# Altium PCB FlexEMG_v0r0.PcbDoc (part 1 of 2)
Units mil, origin at the board's own origin, x right, y up, seen from the top; angles counter-clockwise.
Board outline 1300 x 1550 mil, 8 copper layers (Top Layer, PWR 1, Signal 1, GND, Signal 2, PWR 2, Signal 3, Bottom Layer), stack 66.302 mil thick; 200 components, 251 nets, 1187 pads, 472 vias.
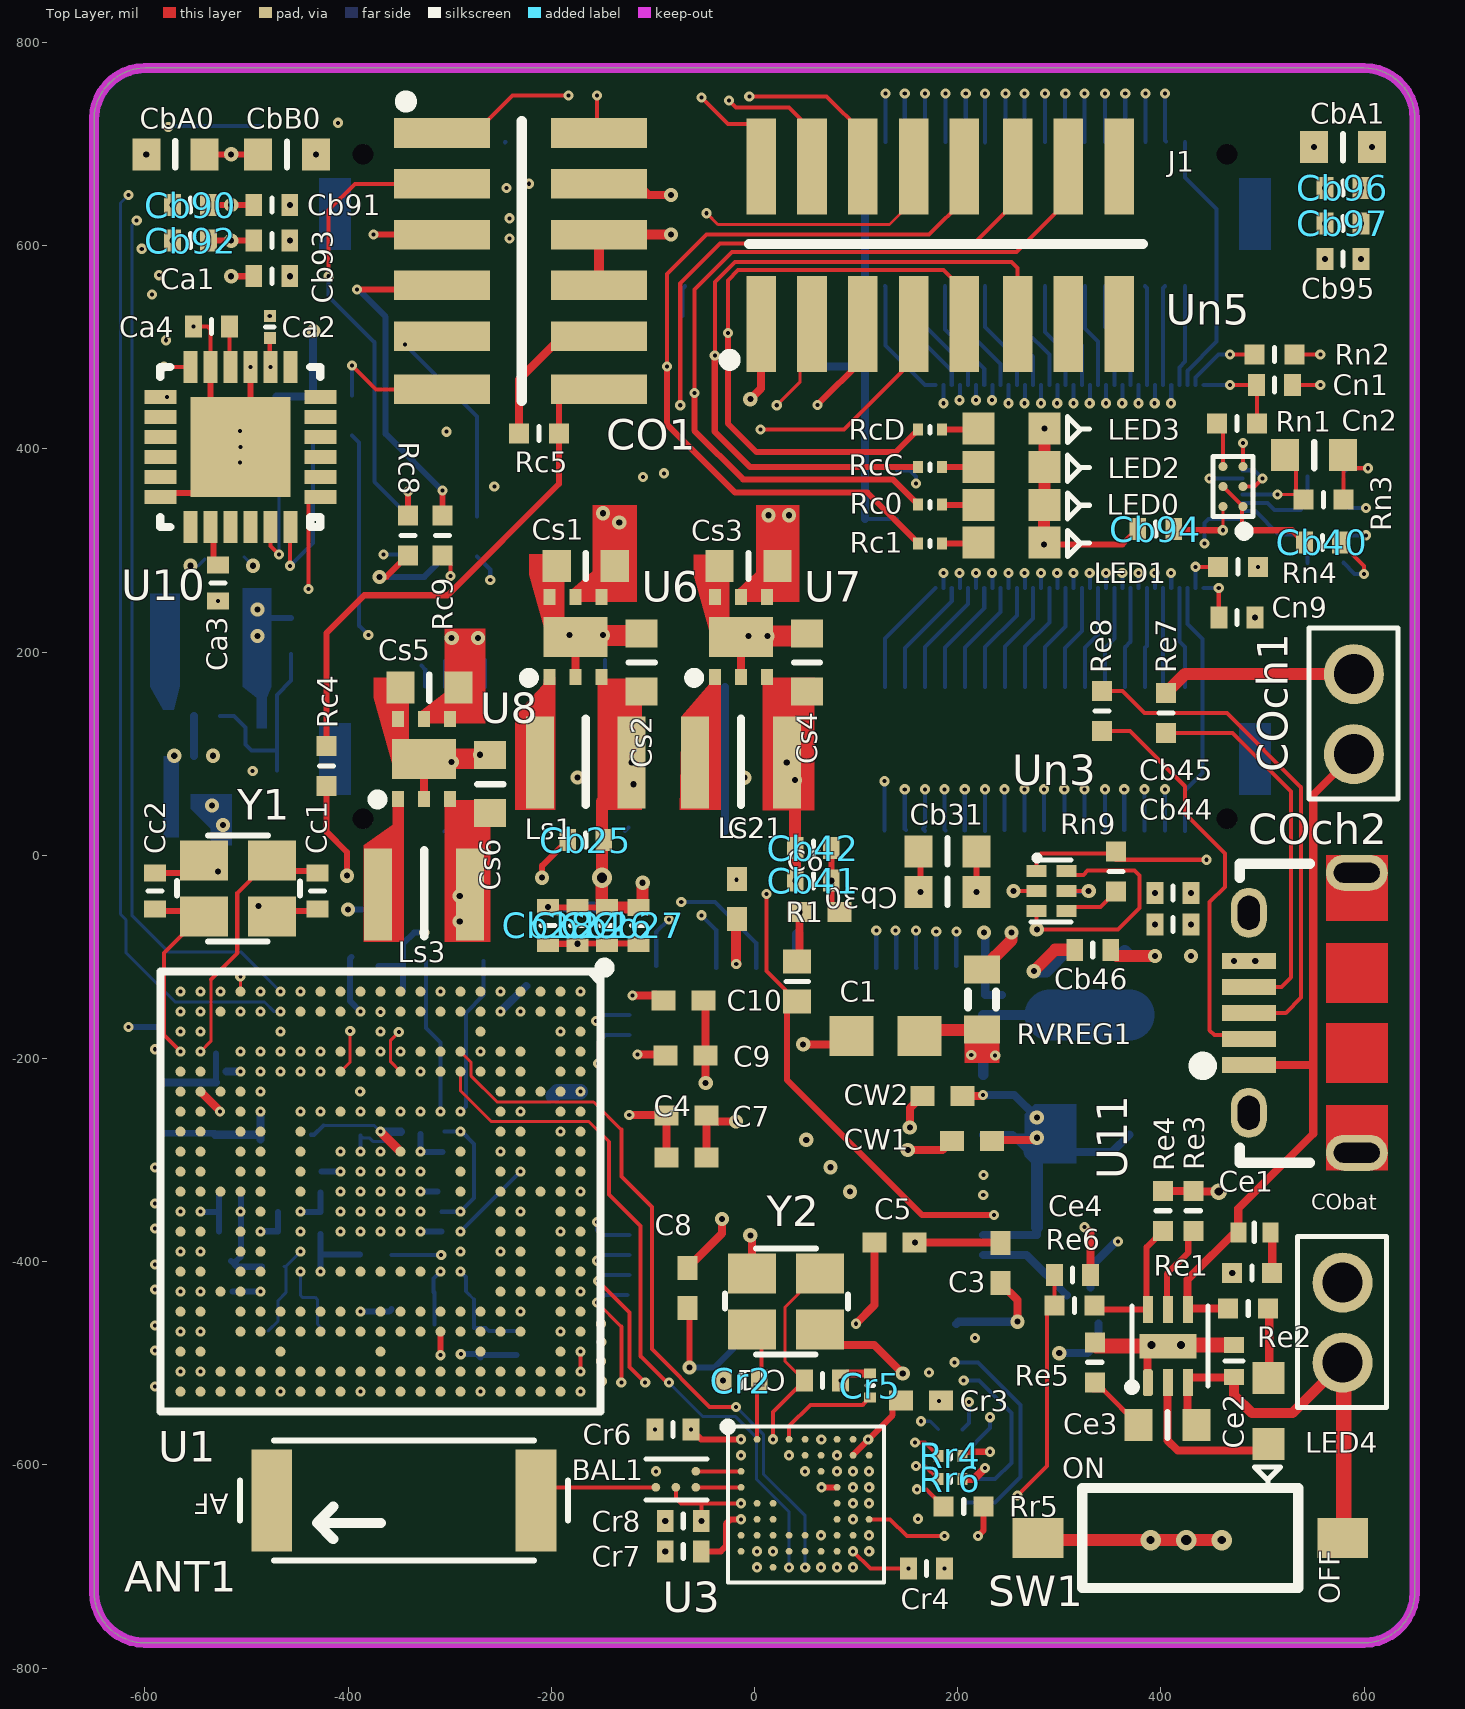
[diagram p0: Top Layer view]
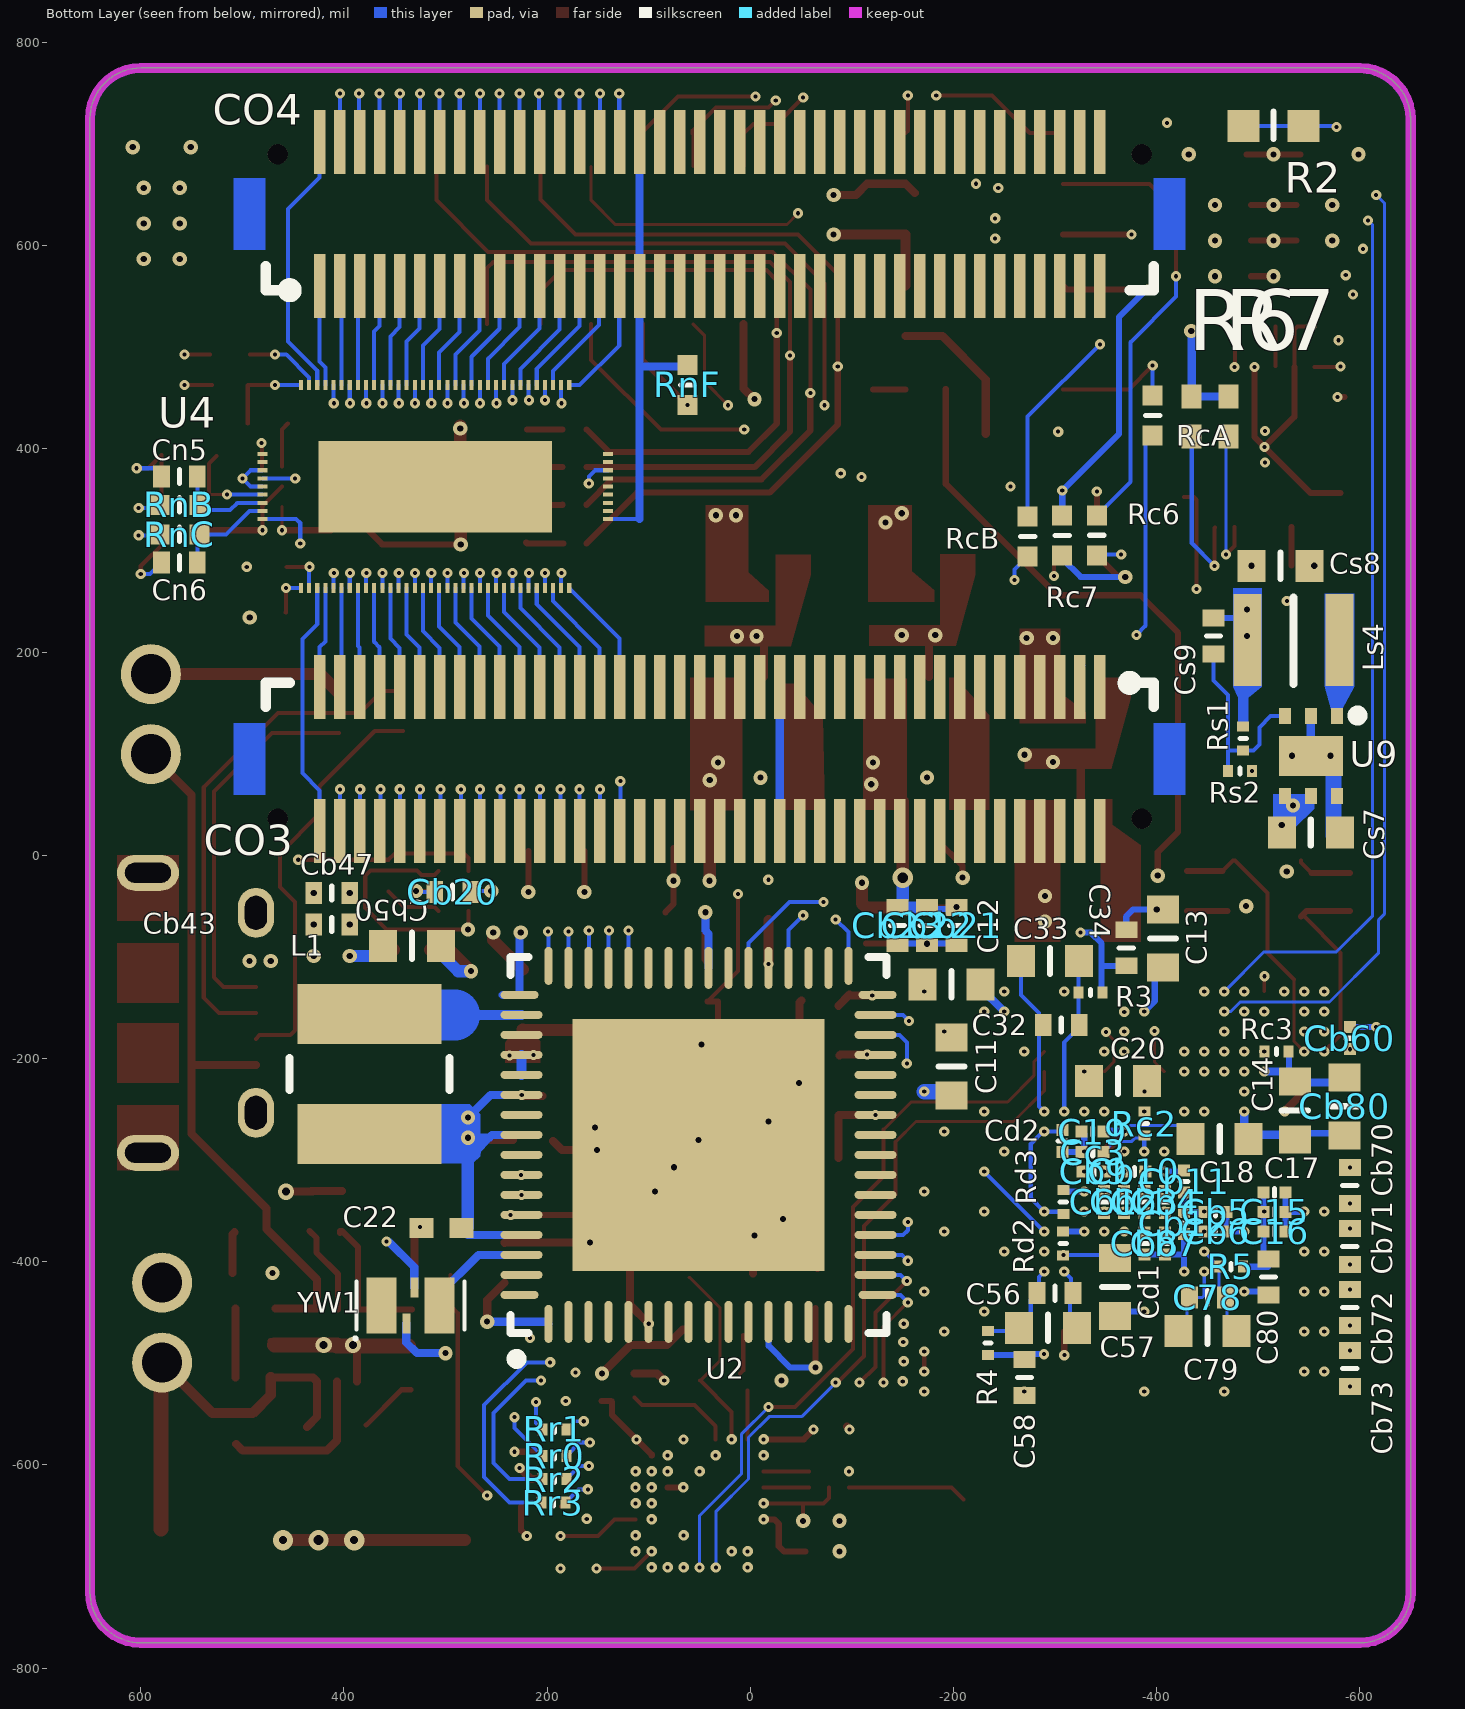
[diagram p1: Bottom Layer view, seen from below]
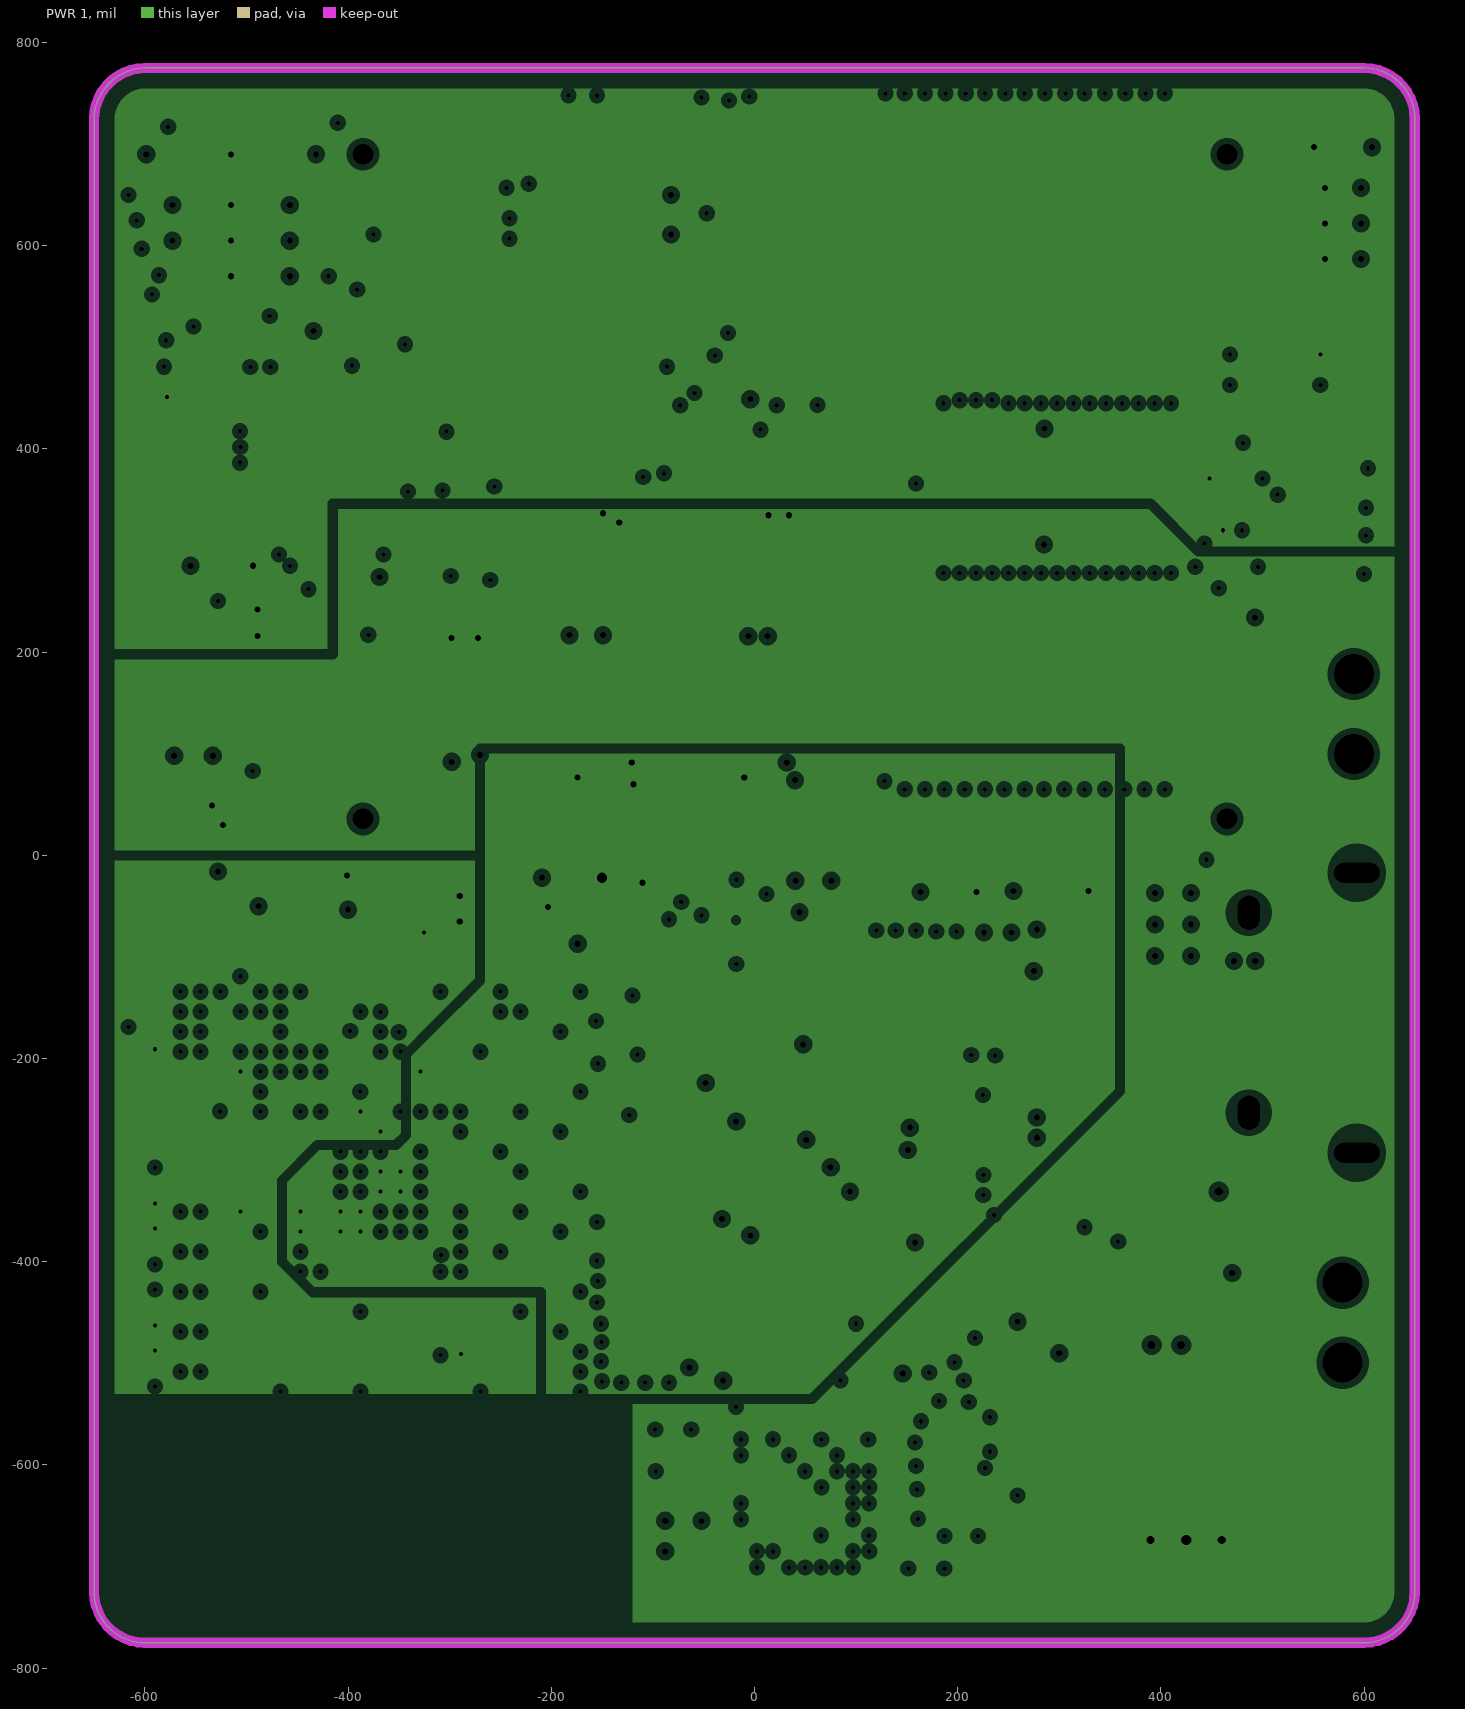
[diagram p2: PWR 1, clearances drawn from the general rule]
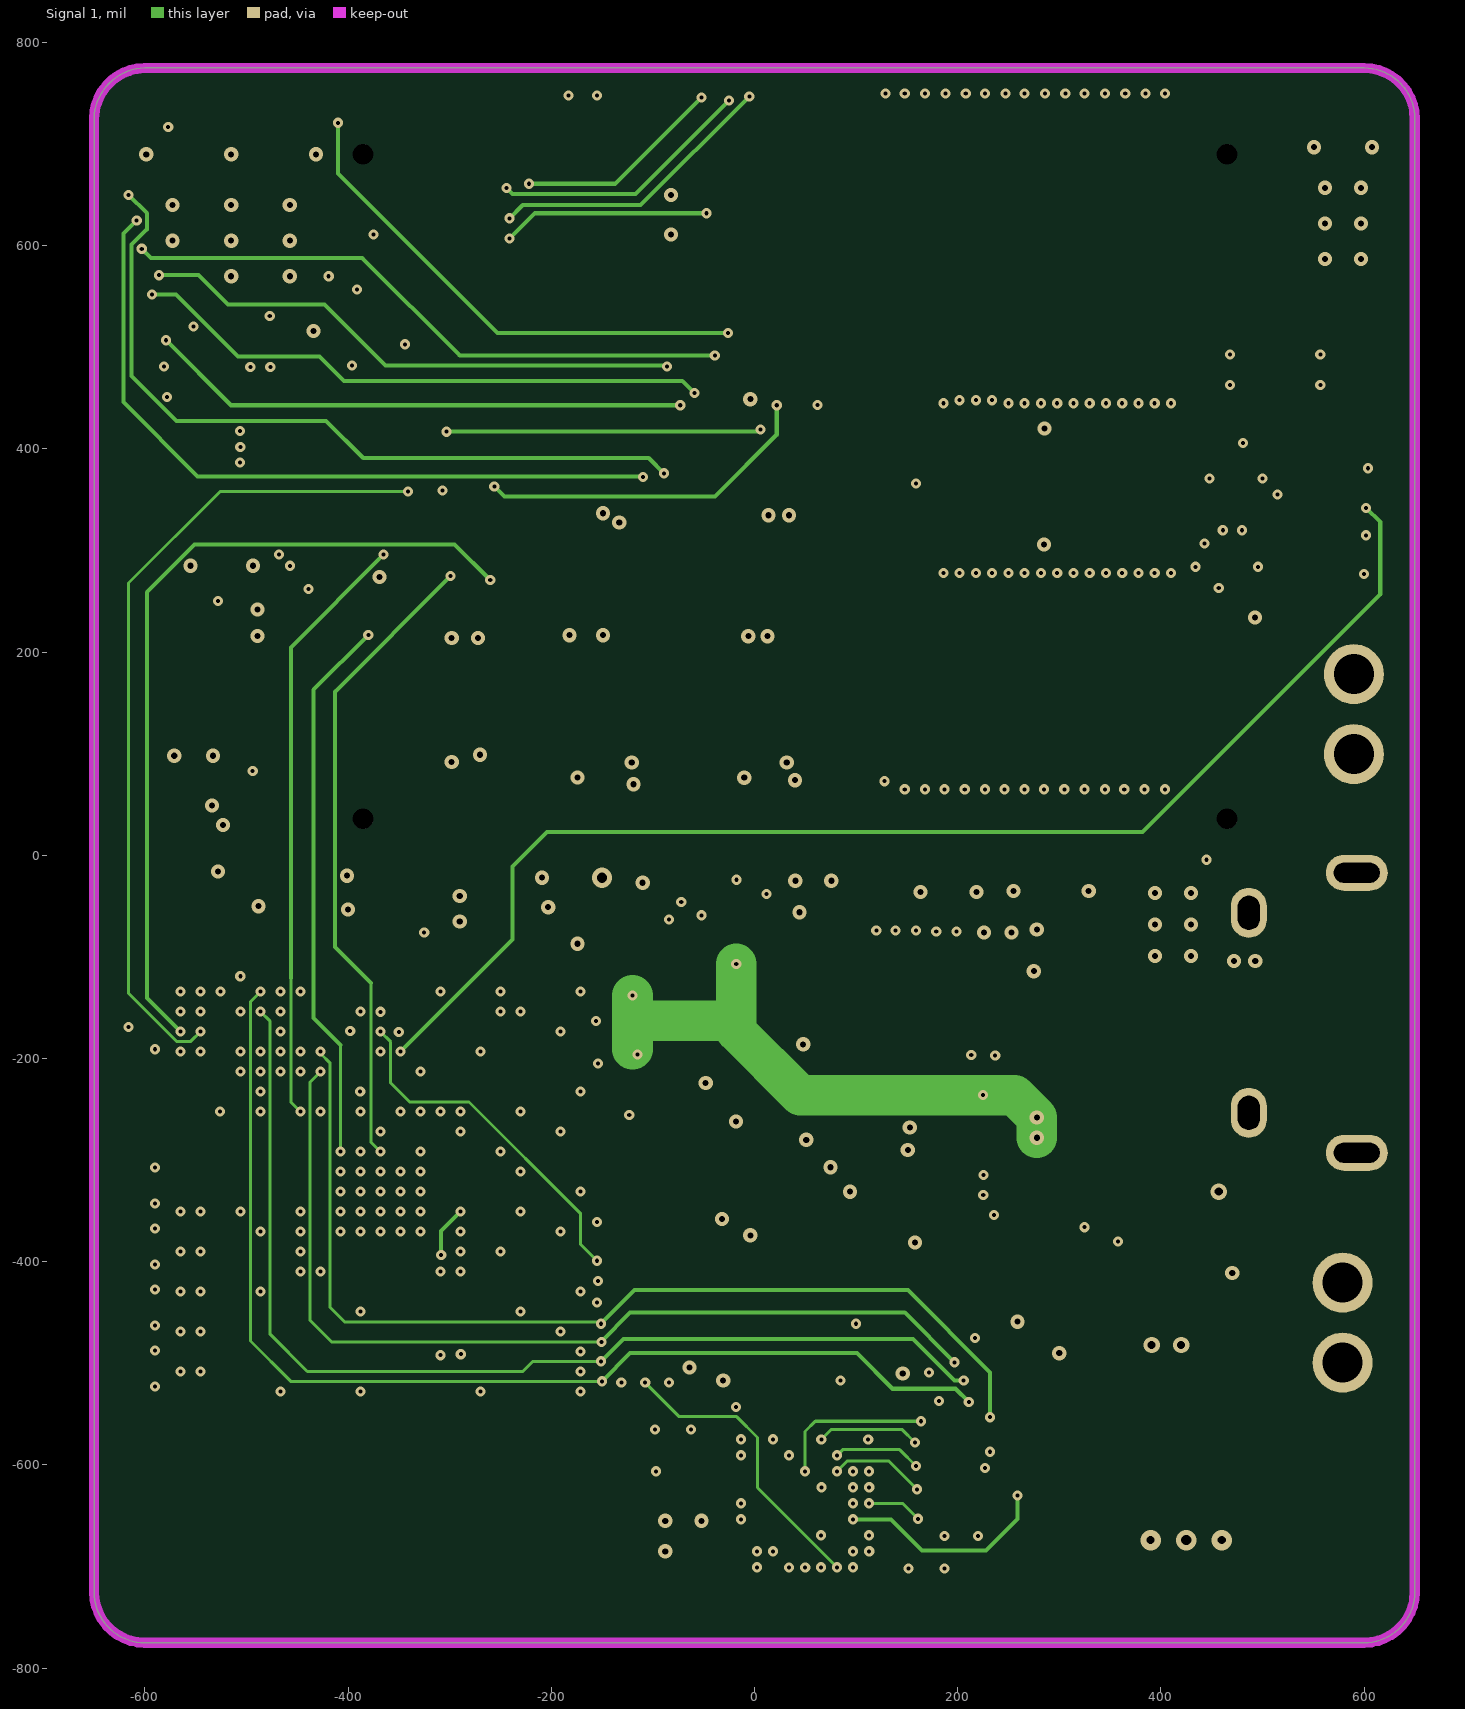
[diagram p3: Signal 1]
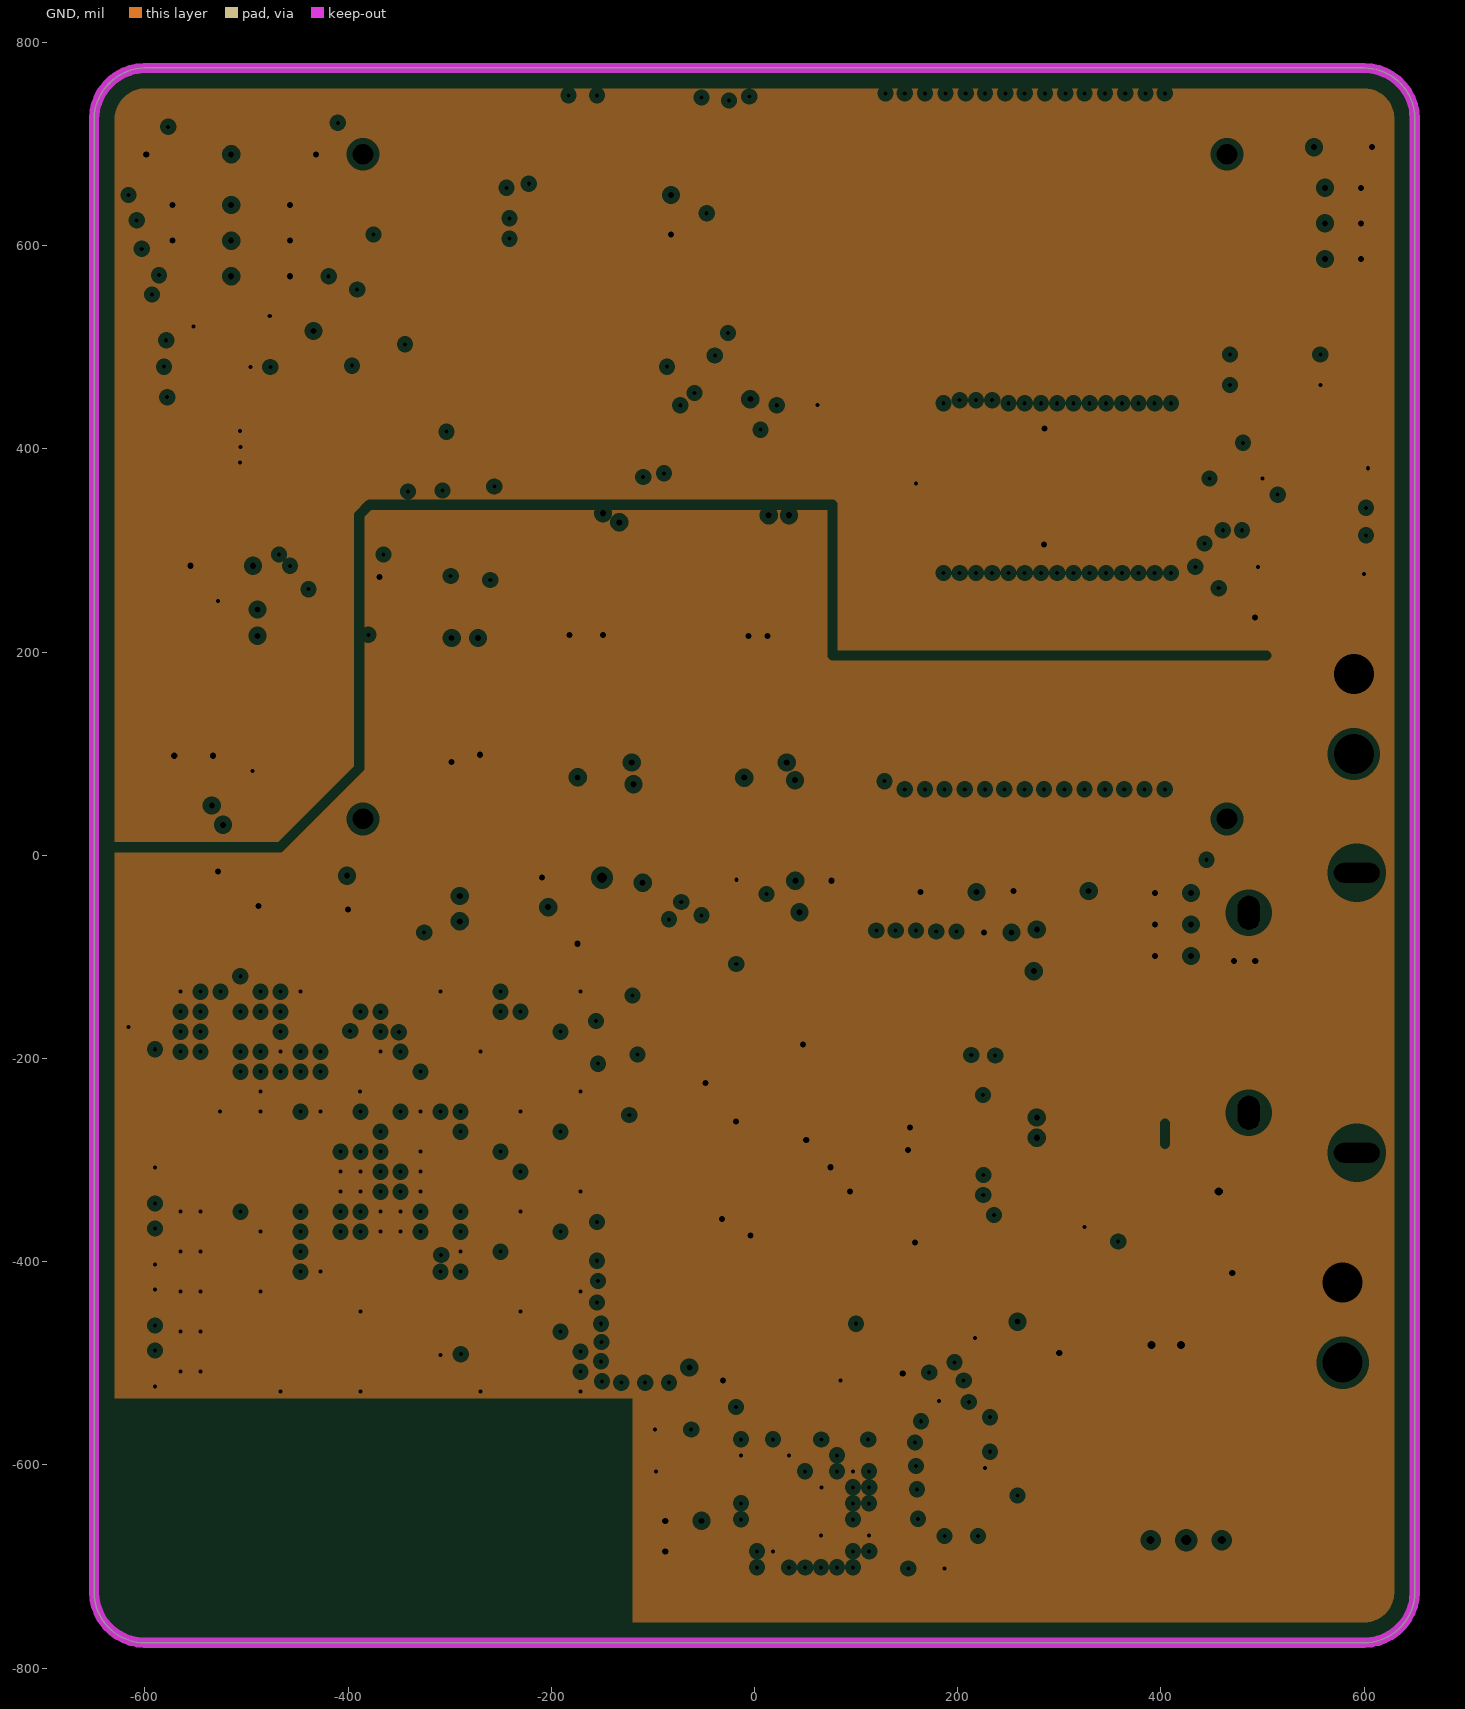
[diagram p4: GND, clearances drawn from the general rule]
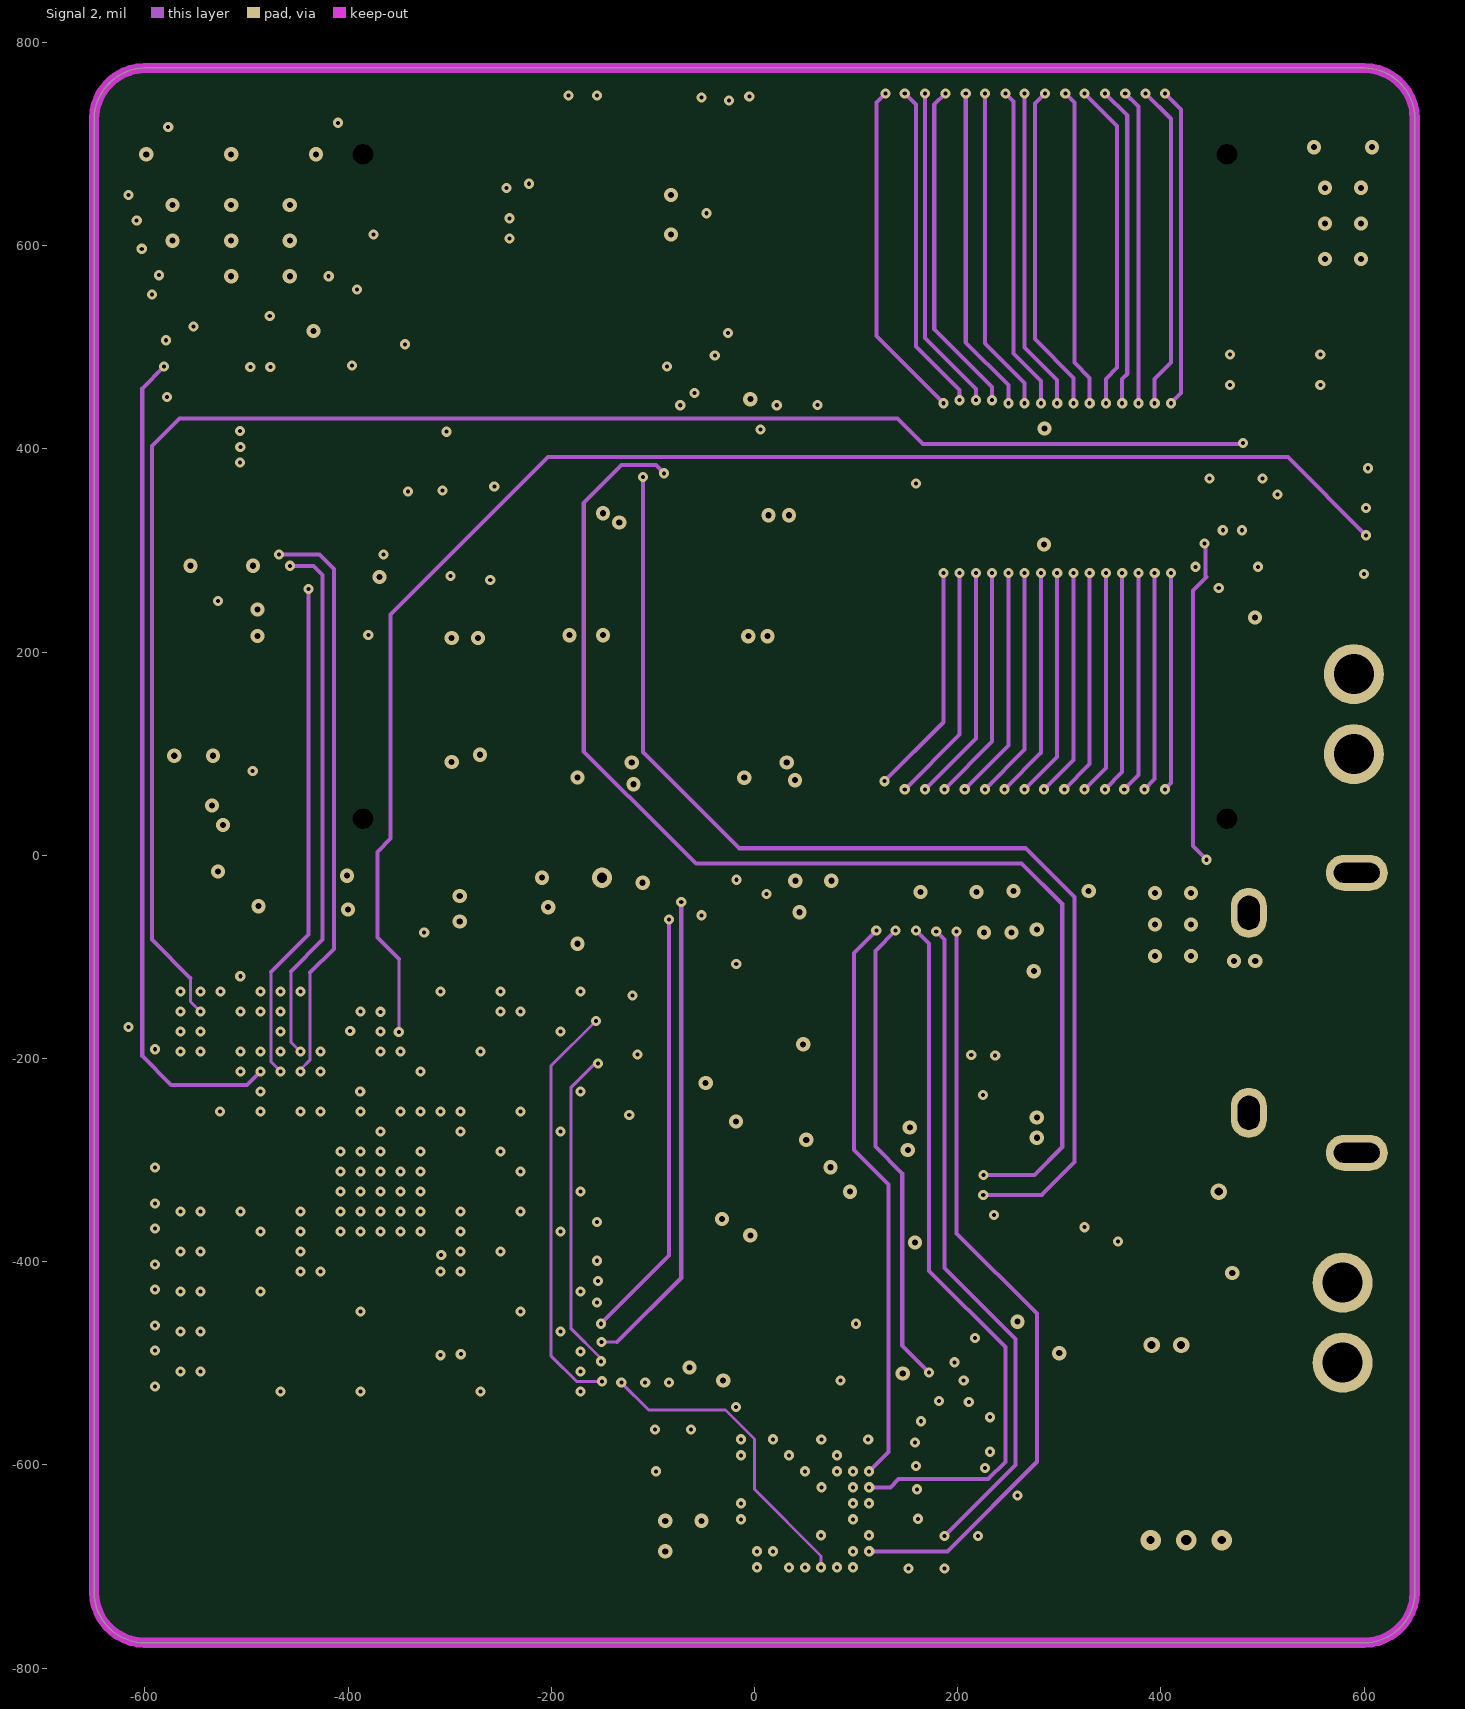
[diagram p5: Signal 2]
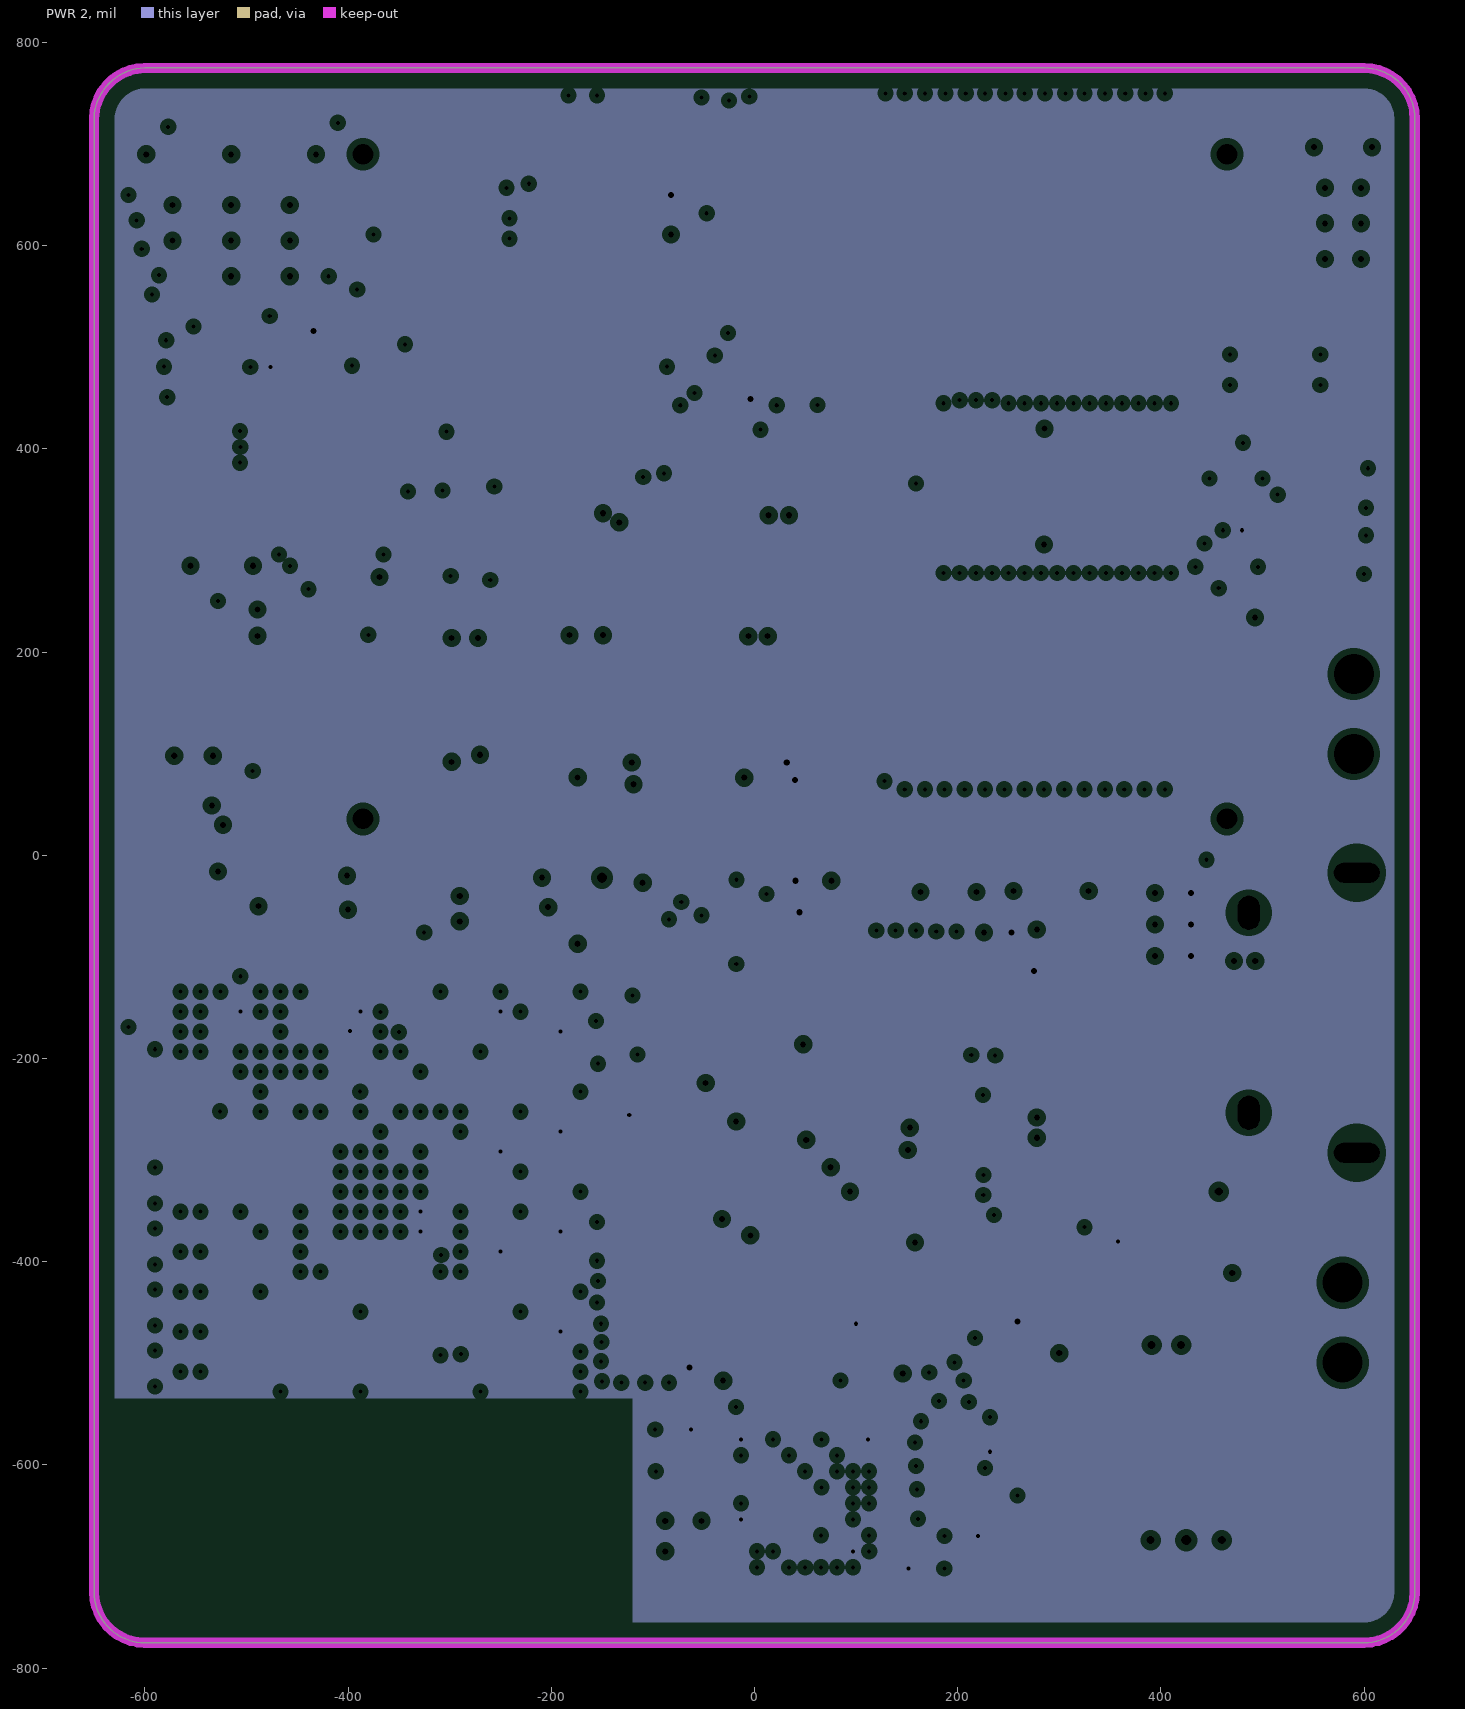
[diagram p6: PWR 2, clearances drawn from the general rule]
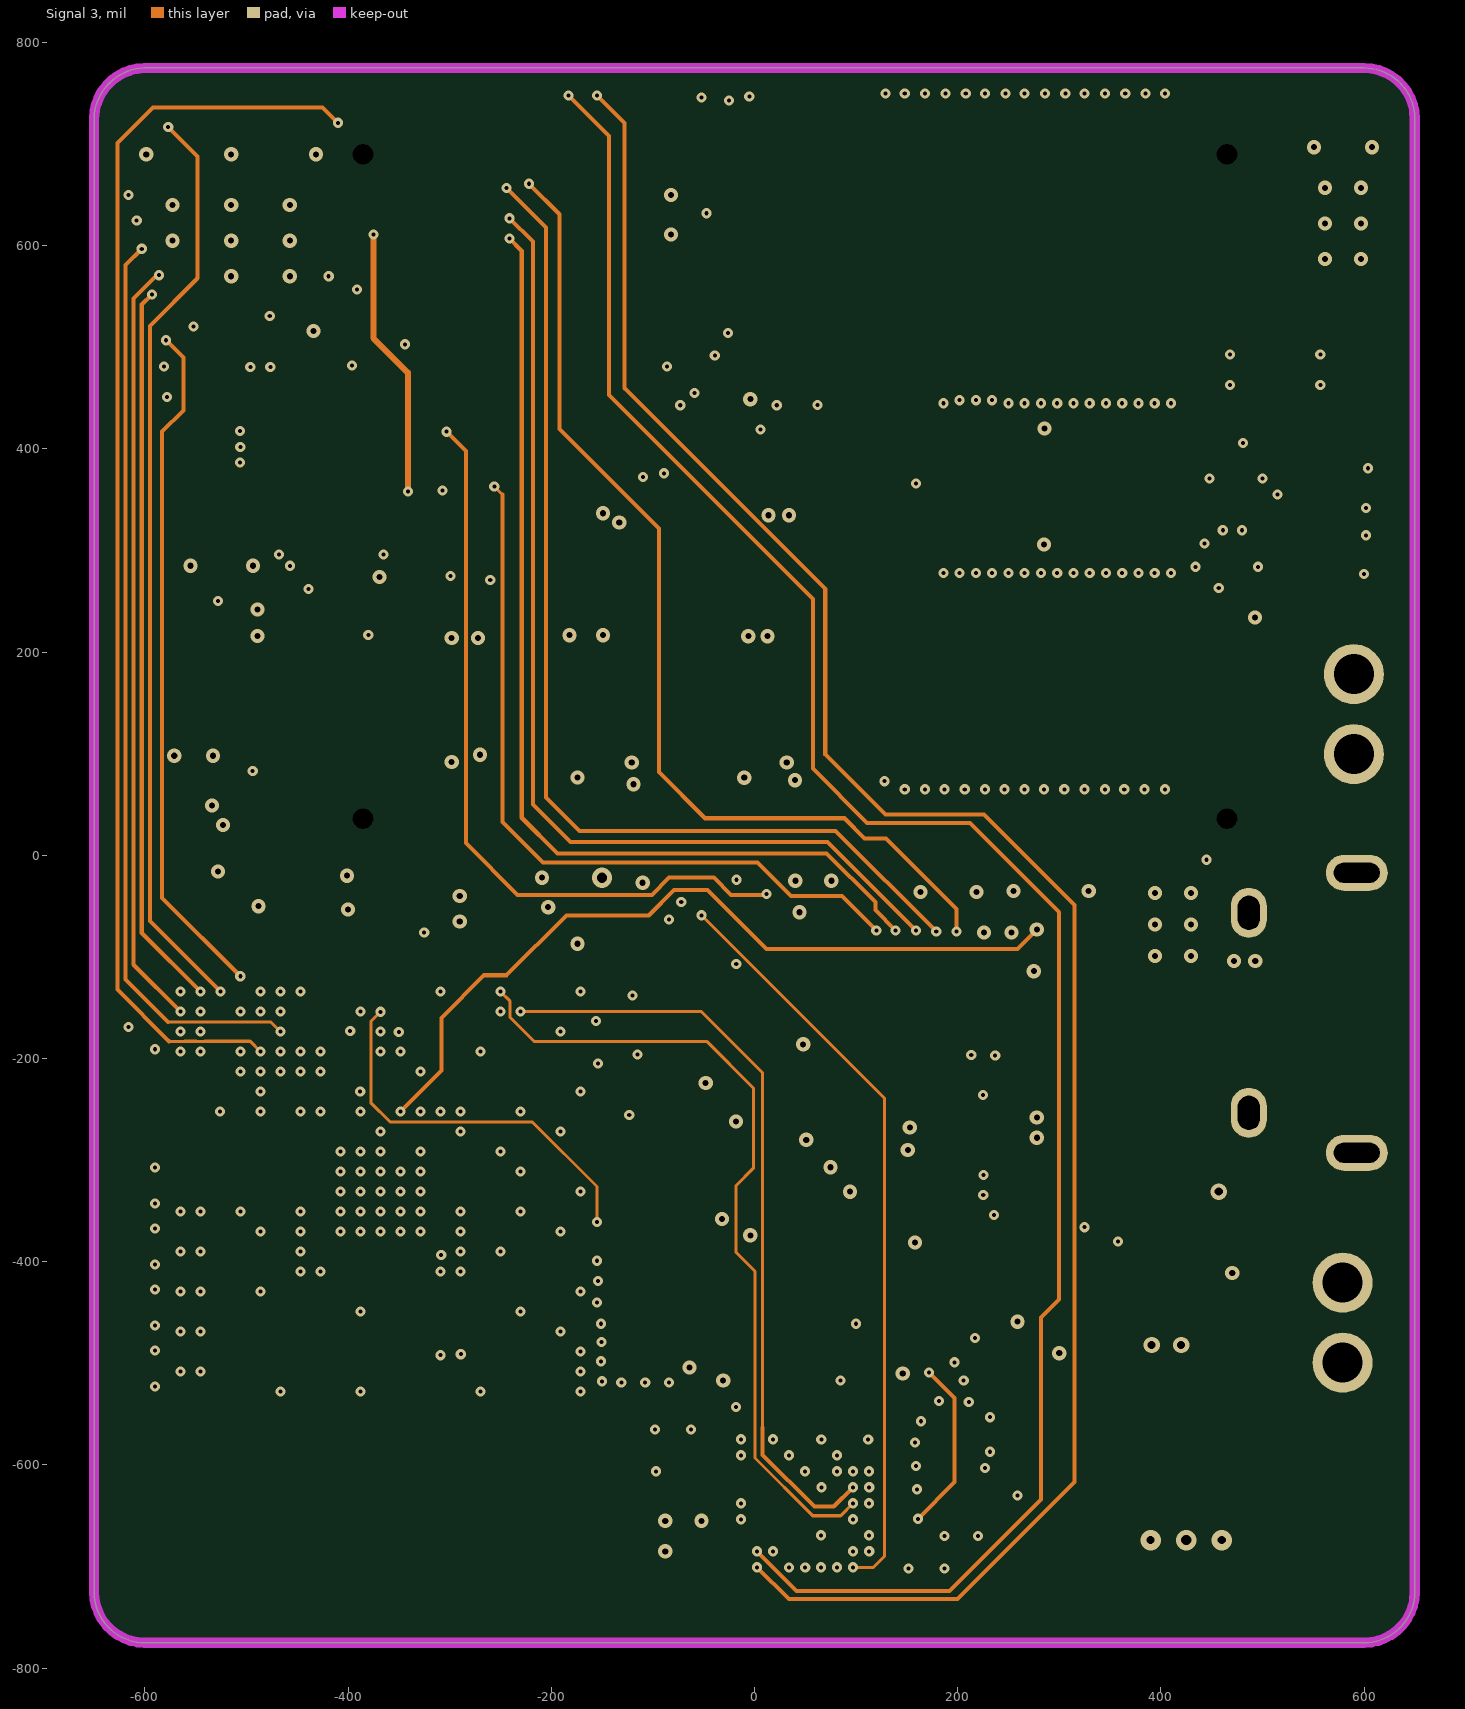
[diagram p7: Signal 3]

## Layer stack, top to bottom
Top Solder: solder mask 0.4, Solder Resist, Dk 3.5
Top Layer: signal copper 1.4
Dielectric 1: core 10, FR-4, Dk 4.2
PWR 1: plane copper 1.417, net (Multiple Nets)
Dielectric 6: prepreg 5, Dk 4.2
Signal 1: signal copper 1.417
Dielectric 9: prepreg 5, Dk 4.2
GND: plane copper 1.417, net GND
Dielectric 7: core 10, Dk 4.2
Signal 2: signal copper 1.417
Dielectric 4: core 10, Dk 4.2
PWR 2: plane copper 1.417, net VDD_1V8
Dielectric 8: prepreg 5, Dk 4.2
Signal 3: signal copper 1.417
Dielectric 5: core 10, Dk 4.2
Bottom Layer: signal copper 1.4
Bottom Solder: solder mask 0.4, Solder Resist, Dk 3.5

## Board outline
-650,-725 -650,725 cw(c-598.75,723.75) -600,775 600,775 cw(c600,725) 650,725 650,-725 cw(c600,-725) 600,-775 -600,-775 cw(c-600,-725)

## Design rules (kind name [scope] priority, off if disabled: settings)
Clearance mdPadClassTrack [InPadClass('Pad_Class') vs IsTrack] p1: gap=4
Clearance Keepout [IsKeepOut] p2: gap=4
Clearance mdViaVia [IsVia vs IsVia] p3: gap=4
Clearance mdPadVia [IsPad vs IsVia] p4: gap=4
Clearance mdPadPad [IsPad vs IsPad] p5: gap=4
Clearance mdWireVia [(InLayerClass('Signal Layers') AND IsTrack) vs IsVia] p6: gap=3
Clearance mdWirePad [(InLayerClass('Signal Layers') AND IsTrack) vs IsPad] p7: gap=3
Clearance mdWireWire [(InLayerClass('Signal Layers') AND IsTrack) vs (InLayerClass('Signal Layers') AND IsTrack)] p8: gap=4
Clearance [All] p9: gap=4
ComponentClearance [All] p1: gap=5 collisioncheckmode=3 verticalgap=5 showdistances=FALSE
HoleSize [All] p1: absolutevalues=TRUE maxlimit=100000 minlimit=2 maxpercent=80.000 minpercent=20.000
HoleToHoleClearance [All] p1: gap=4 allowstackedmicrovias=TRUE
MinimumSolderMaskSliver [All] p1 off: minsoldermaskwidth=2
PlaneClearance [All] p1: clearance=6
PlaneConnect [All] p1: planeconnectstyle=Direct reliefexpansion=20 reliefentries=4 reliefconductorwidth=10 reliefairgap=10
PolygonConnect ThermalVias [IsVia] p1: connectstyle=Direct reliefconductorwidth=10 reliefentries=4 polygonreliefangle="90 Angle" airgapwidth=10
PolygonConnect [All] p2: connectstyle=Direct reliefconductorwidth=10 reliefentries=4 polygonreliefangle="90 Angle" airgapwidth=10
RoutingLayers RoutingLayers_4 [All] p1: top layer_v5=TRUE mid layer 1_v5=TRUE mid layer 2_v5=TRUE mid layer 3_v5=TRUE bottom layer_v5=TRUE
RoutingLayers [All] p2: top layer_v5=TRUE mid layer 1_v5=TRUE mid layer 2_v5=TRUE mid layer 3_v5=TRUE bottom layer_v5=TRUE
RoutingVias [All] p1: holewidth=6 width=14 viastyle="Through Hole" minholewidth=4 minwidth=9 maxholewidth=10 maxwidth=20
ShortCircuit "Schematic Short-Circuit Constraint_1" [HasPad('COch2-8')] p1: allowed=TRUE
ShortCircuit "Schematic Short-Circuit Constraint" [HasPad('COch2-9')] p2: allowed=TRUE
ShortCircuit [All] p3: allowed=FALSE
SilkToSilkClearance [All] p1 off: silktosilkclearance=10
SilkToSolderMaskClearance [IsPad] p1 off: minsilkscreentomaskgap=10 clearancetoexposedcopper=TRUE
SolderMaskExpansion [All] p1: expansion=2
UnpouredPolygon [All] p1: allowunpoured=FALSE
Width [All] p1: maxlimit=50 minlimit=3 preferedwidth=4
19 further rules are at their usual default settings.

## Classes and differential pairs
component class FlexEMG_v0r0_BATT-CHARGER: 14 Ce1 Ce2 Ce3 Ce4 CObat CObat1 COch1 COch2 LED4 Re1 Re2 Re3 Re4 Re5 Re6 Re7 Re8 SW1 U11
component class FlexEMG_v0r0_ACCEL: Ca1 Ca2 Ca3 Ca4 R6 R7 U10
component class FlexEMG_v0r0_SF2_DDR: C1 C3 C4 C5 C6 C7 C8 C9 C10 C21 C22 Cd1 Cd2 CW1 CW2 J1 L1 LED0 LED1 LED2 LED3 R1 R2 Rc0 Rc1 RcC RcD Rd2 Rd3 RVREG1 U1 U2 YW1
pad class Pad_Class: COchg2-6 COchg2-7 COchg2-8 COchg2-9
component class FlexEMG_v0r0_SF2-COMM: Cc1 Cc2 Cc3 CO1 Rc2 Rc3 Rc4 Rc5 Rc6 Rc7 Rc8 Rc9 RcA RcB Y1
component class FlexEMG_v0r0_POWER-SUPPLIES: Cs1 Cs2 Cs3 Cs4 Cs5 Cs6 Cs7 Cs8 Cs9 Ls1 Ls2 Ls3 Ls4 Rs1 Rs2 U6 U7 U8 U9
component class FlexEMG_v0r0_RADIO: ANT1 BAL1 Cr1 Cr2 Cr3 Cr4 Cr5 Cr6 Cr7 Cr8 Rr0 Rr1 Rr2 Rr3 Rr4 Rr5 Rr6 U3 Y2
component class FlexEMG_v0r0_SF2-POWER: C11 C12 C13 C14 C15 C16 C17 C18 C19 C20 C32 C33 C34 C56 C57 C58 C78 C79 C80 Cb1 Cb2 Cb3 Cb4 Cb5 Cb6 Cb7 Cb8 Cb9 Cb10 Cb11 Cb12 Cb21 Cb22 Cb23 Cb24 Cb25 Cb26 Cb27 Cb28 Cb30 Cb31 Cb41 Cb42 Cb43 Cb44 Cb45 Cb46 Cb47 Cb50 Cb60 Cb70 Cb71 Cb72 Cb73 Cb80 Cb90 Cb91 Cb92 Cb93 Cb95 Cb96 Cb97 CbA0 CbA1 CbB0 R3 R4 R5
component class FlexEMG_v0r0_NM: Cb20 Cb40 Cb94 Cn1 Cn2 Cn5 Cn6 Cn9 CO3 CO4 Rn1 Rn2 Rn3 Rn4 Rn9 RnB RnC RnF U4 Un3 Un5

## Components (designator, comment, footprint, x,y, rotation, side; value= is the part's Value field where it differs from the comment)
ANT1 "ANT-2.45-CHP-T" ANTENNACHIP -345,-635 r180 top
BAL1 "2450BM08B0003T" BALUN_PACKAGE -77,-612 r180 top
C1 "NC" J1-0603#1 129,-178 r0 top
C3 "100nF" 0402#1 242,-401 r270 top
C4 "100nF" 0402_ss -67,-298 r180 top
C5 "100nF" 0402#1 138,-381 r180 top
C6 "100nF" 0402#1 64,-56 r180 top
C7 "100nF" 0402#1 -67,-256 r180 top
C8 "100nF" 0402#1 -66,-426 r270 top
C9 "100nF" 0402#1 -68,-197 r180 top
C10 "100nF" 0402#1 -70,-143 r180 top
C11 "GRM188R6YA475KE15D" C0603-MURATA-GR -198,-208 r90 bottom
C12 "GRM188R6YA475KE15D" C0603-MURATA-GR -198,-127 r180 bottom
C13 "GRM188R6YA475KE15D" C0603-MURATA-GR -406,-82 r270 bottom
C14 "GRM188R6YA475KE15D" C0603-MURATA-GR -536,-251 r90 bottom
C15 "GRM033R6YA104KE14D" C0201-MURATA-GR -516,-351 r0 bottom
C16 "GRM033R6YA104KE14D" C0201-MURATA-GR -516,-370 r0 bottom
C17 "GRM033R6YA104KE14D" C0201-MURATA-GR -516,-332 r0 bottom
C18 "GRM188R61E106MA73D" C0603-MURATA-GR -462,-279 r0 bottom
C19 "GRM033R6YA104KE14D" C0201-MURATA-GR -337,-272 r180 bottom
C20 "GRM188R6YA475KE15D" C0603-MURATA-GR -362,-222 r0 bottom
C21 "100nF" 0402#1 -17,-43 r270 top
C22 "100nF" 0402#1 304,-367 r180 bottom
C32 "GRM155R61H104KE19D" C0402-MURATA-GR -306,-167 r180 bottom
C33 "GRM187R61A226ME15D" C0603-MURATA-GR -295,-104 r180 bottom
C34 "GRM155R61H104KE19D" C0402-MURATA-GR -370,-91 r270 bottom
C56 "GRM155R61H104KE19D" C0402-MURATA-GR -300,-431 r0 bottom
C57 "GRM187R61A226ME15D" C0603-MURATA-GR -293,-465 r0 bottom
C58 "GRM155R61H104KE19D" C0402-MURATA-GR -270,-514 r90 bottom
C78 "GRM155R61H104KE19D" C0402-MURATA-GR -450,-435 r180 bottom
C79 "GRM187R61A226ME15D" C0603-MURATA-GR -450,-468 r180 bottom
C80 "GRM155R61H104KE19D" C0402-MURATA-GR -510,-415 r90 bottom
Ca1 "GRM155R61H104KE19D" C0402-MURATA-GR -475,570 r180 top
Ca2 "0201" C0201-MURATA-GR -477,520 r270 top
Ca3 "" C0402-MURATA-GR -528,268 r90 top
Ca4 "GRM155R61H104KE19D" C0402-MURATA-GR -534.39,520.53 r0 top
Cb1 "GRM033R6YA104KE14D" C0201-MURATA-GR -348,-341 r90 bottom
Cb2 "GRM033R6YA104KE14D" C0201-MURATA-GR -368,-341 r90 bottom
Cb3 "GRM033R6YA104KE14D" C0201-MURATA-GR -388,-341 r270 bottom
Cb4 "GRM033R6YA104KE14D" C0201-MURATA-GR -408,-341 r270 bottom
Cb5 "GRM033R6YA104KE14D" C0201-MURATA-GR -458,-351 r0 bottom
Cb6 "GRM033R6YA104KE14D" C0201-MURATA-GR -458,-370 r0 bottom
Cb7 "GRM033R6YA104KE14D" C0201-MURATA-GR -408,-382 r90 bottom
Cb8 "GRM033R6YA104KE14D" C0201-MURATA-GR -388,-382 r90 bottom
Cb9 "GRM033R6YA104KE14D" C0201-MURATA-GR -338,-311 r180 bottom
Cb10 "GRM033R6YA104KE14D" C0201-MURATA-GR -378,-311 r0 bottom
Cb11 "GRM033R6YA104KE14D" C0201-MURATA-GR -427,-321 r270 bottom
Cb12 "GRM033R6YA104KE14D" C0201-MURATA-GR -427,-362 r90 bottom
Cb20 "GRM155R61H104KE19D" C0402-MURATA-GR 293,-36 r0 bottom
Cb21 "GRM155R61H104KE19D" C0402-MURATA-GR -203,-69 r90 bottom
Cb22 "GRM155R61H104KE19D" C0402-MURATA-GR -174,-69 r90 bottom
Cb23 "GRM155R61H104KE19D" C0402-MURATA-GR -145,-69 r90 bottom
Cb24 "GRM155R61H104KE19D" C0402-MURATA-GR -174,-69 r90 top
Cb25 "GRM155R61H104KE19D" C0402-MURATA-GR -166,15 r0 top
Cb26 "GRM155R61H104KE19D" C0402-MURATA-GR -145,-69 r90 top
Cb27 "GRM155R61H104KE19D" C0402-MURATA-GR -114,-69 r90 top
Cb28 "GRM155R61H104KE19D" C0402-MURATA-GR -203,-69 r90 top
Cb30 "GRM187R61A226ME15D" C0603-MURATA-GR 190,-36 r0 top
Cb31 "GRM188R6YA475KE15D" C0603-MURATA-GR 190,4 r0 top
Cb40 "GRM155R61H104KE19D" C0402-MURATA-GR 559,308 r180 top
Cb41 "GRM155R61H104KE19D" C0402-MURATA-GR 58,-25 r180 top
Cb42 "GRM155R61H104KE19D" C0402-MURATA-GR 58,7 r180 top
Cb43 "GRM155R61H104KE19D" C0402-MURATA-GR 412,-68 r0 bottom
Cb44 "GRM155R61H104KE19D" C0402-MURATA-GR 412,-68 r0 top
Cb45 "GRM155R61H104KE19D" C0402-MURATA-GR 412,-37 r0 top
Cb46 "GRM155R61H104KE19D" C0402-MURATA-GR 333,-93 r180 top
Cb47 "GRM155R61H104KE19D" C0402-MURATA-GR 412,-37 r0 bottom
Cb50 "GRM187R61A226ME15D" C0603-MURATA-GR 333,-89 r180 bottom
Cb60 "GRM033R6YA104KE14D" C0201-MURATA-GR -590,-180 r270 bottom
Cb70 "GRM155R61H104KE19D" C0402-MURATA-GR -590,-325 r270 bottom
Cb71 "GRM155R61H104KE19D" C0402-MURATA-GR -590,-385 r90 bottom
Cb72 "GRM155R61H104KE19D" C0402-MURATA-GR -590,-445 r270 bottom
Cb73 "GRM155R61H104KE19D" C0402-MURATA-GR -590,-505 r90 bottom
Cb80 "GRM187R61A226ME15D" C0603-MURATA-GR -585,-247 r90 bottom
Cb90 "GRM155R61H104KE19D" C0402-MURATA-GR -555,640 r0 top
Cb91 "GRM155R61H104KE19D" C0402-MURATA-GR -475,640 r180 top
Cb92 "GRM155R61H104KE19D" C0402-MURATA-GR -555,605 r0 top
Cb93 "GRM155R61H104KE19D" C0402-MURATA-GR -475,605 r180 top
Cb94 "GRM155R61H104KE19D" C0402-MURATA-GR 395,321 r0 top
Cb95 "GRM155R61H104KE19D" C0402-MURATA-GR 579.28,587 r180 top
Cb96 "GRM155R61H104KE19D" C0402-MURATA-GR 579.28,657 r180 top
Cb97 "GRM155R61H104KE19D" C0402-MURATA-GR 579.28,622 r180 top
CbA0 "GRM188R61E106MA73D" C0603-MURATA-GR -570,690 r0 top
CbA1 "GRM188R6YA475KE15D" C0603-MURATA-GR 579.28,697 r180 top
CbB0 "GRM187R61A226ME15D" C0603-MURATA-GR -460,690 r180 top
Cc1 "GRM1555C1H120FA01D" C0402-MURATA-GR -430,-35 r90 top
Cc2 "GRM1555C1H120FA01D" C0402-MURATA-GR -590,-35 r270 top
Cc3 "0201" C0201-MURATA-GR -337,-292 r180 bottom
Cd1 "GRM188R61E106MA73D" C0603-MURATA-GR -359,-425 r90 bottom
Cd2 "GRM033R6YA104KE14D" C0201-MURATA-GR -307,-281 r90 bottom
Ce1 "C1005X5R1C105M050BC" C0402-TDK-C 492,-371 r180 top
Ce2 "C1005X5R1C105M050BC" C0402-TDK-C 472,-497.75 r270 top
Ce3 "GRM188R6YA475KE15D" C0603-MURATA-GR 406.68,-560.82 r0 top
Ce4 "GRM155R61H102KA01D" C0402-MURATA-GR 313,-413 r180 top
Cn1 "GRM1555C1H5R0BA01D" C0402-MURATA-GR 512,463 r180 top
Cn2 "GRM188R61E106MA73D" C0603-MURATA-GR 551,394 r180 top
Cn5 "DNI" C0402-MURATA-GR 562,373 r180 bottom
Cn6 "DNI" C0402-MURATA-GR 562,288 r180 bottom
Cn9 "GRM155R61H104KE19D" C0402-MURATA-GR 475,234 r180 top
CO1 "JTAG_SWD_12_F-SF2-Nor" CONN_12-CLP -229,585 r270 top
CO3 "CONN_DF12_80pin" CONN_DF12(3.0)-80DP_BOTTOM 40,95 r0 bottom
CO4 "CONN_DF12_80pin" CONN_DF12(3.0)-80DP_BOTTOM 40,631 r180 bottom
CObat "Header, 2 pin" "HEADER, 2 PIN, 2MM(79MIL)" 579,-460 r90 top
COch1 "Header, 2 pin" "HEADER, 2 PIN, 2MM(79MIL)" 590,139 r90 top
COch2 "USB micro-B" USB-MICROB_AMP_10118194-0001LF 650,-155 r90 top
Cr1 "GRM1555C1H120FA01D" C0402-MURATA-GR 67,-517 r0 top
Cr2 "GRM1555C1H120FA01D" C0402-MURATA-GR -13,-517 r180 top
Cr3 "GRM033R6YA104KE14D" 0402_ss 164,-537 r180 top
Cr4 "GRM155R61H104KE19D" C0402-MURATA-GR 169.25,-702 r180 top
Cr5 "GRM033R6YA104KE14D" 0201 114,-510 r270 top
Cr6 "GRM155R61H102KA01D" C0402-MURATA-GR -80,-565 r180 top
Cr7 "GRM155R71E473KA88D" C0402-MURATA-GR -70,-685 r0 top
Cr8 "" C0402-MURATA-GR -70,-655 r0 top
Cs1 "GRM188R6YA475KE15D" C0603-MURATA-GR -166,284.73 r0 top
Cs2 "GRM188R61E106MA73D" C0603-MURATA-GR -111,189.73 r270 top
Cs3 "GRM188R6YA475KE15D" C0603-MURATA-GR -6,284.73 r0 top
Cs4 "GRM188R61E106MA73D" C0603-MURATA-GR 51.64,189.73 r270 top
Cs5 "GRM188R6YA475KE15D" C0603-MURATA-GR -320,165 r0 top
Cs6 "GRM188R61E106MA73D" C0603-MURATA-GR -260,70 r270 top
Cs7 "GRM188R6YA475KE15D" C0603-MURATA-GR -551.59,22.63 r0 bottom
Cs8 "GRM188R61E106MA73D" C0603-MURATA-GR -522,285 r0 bottom
Cs9 "GRM1555C1H220FA01D" C0402-MURATA-GR -456,216 r90 bottom
CW1 "4.7uF" 0402#1 214,-281 r0 top
CW2 "100nF" 0402#1 185,-237 r0 top
J1 "JTAG_16F" CONN_16-CLP 185,601 r0 top
L1 "SRN4026-220M" BOUR-IND-SRN4026 375,-215 r90 bottom
LED0 "Manufactrurer PN" LED-0603 253,345 r0 top
LED1 "Manufactrurer PN" LED-0603 253,308 r0 top
LED2 "Manufactrurer PN" LED-0603 253,382 r0 top
LED3 "Manufactrurer PN" LED-0603 253,420 r0 top
LED4 "Manufactrurer PN" LED-0603 506,-547 r270 top
Ls1 "" LEAD_REGULATOR -251,84.73 r180 top
Ls2 "" LEAD_REGULATOR -98.36,84.73 r180 top
Ls3 "" LEAD_REGULATOR -410,-45 r180 top
Ls4 "" LEAD_REGULATOR -619.59,218.63 r180 bottom
R1 "NC" 0402#2 42,-124 r90 top
R2 "" 0603 -515,718 r0 bottom
R3 "ERJ-1GEF1001C" 0201_P -335,-135 r0 bottom
R4 "ERJ-1GEF1001C" 0201_P -234,-480 r90 bottom
R5 "ERJ-1GEF1001C" 0201_P -473,-405 r0 bottom
R6 "Res3" 0402_ss -434,432 r90 bottom
R7 "Res3" 0402_ss -470,432 r90 bottom
Rc0 "ERJ-2RKF1100X" 0201_P 173,345 r180 top
Rc1 "ERJ-2RKF1100X" 0201_P 173,307 r180 top
Rc2 "ERJ-1GEF1002C" 0201_P -388,-264 r270 bottom
Rc3 "ERJ-1GEF1001C" 0201_P -518,-193 r180 bottom
Rc4 "ERJ-2GE0R00X" 0402_P -421,88 r90 top
Rc5 "ERJ-2GE0R00X" 0402_P -212,415 r180 top
Rc6 "ERJ-PA2J330X" 0402_P -341,315 r270 bottom
Rc7 "ERJ-2RKF1001X" 0402_P -307,315 r90 bottom
Rc8 "ERJ-2RKF1001X" 0402_P -341,315 r90 top
Rc9 "ERJ-PA2J330X" 0402_P -307,315 r90 top
RcA "ERJ-PA2J330X" 0402_P -396,433 r90 bottom
RcB "ERJ-PA2J330X" 0402_P -273,314 r90 bottom
RcC "ERJ-2RKF1100X" 0201_P 173,382 r180 top
RcD "ERJ-2RKF1100X" 0201_P 173,419 r180 top
Rd2 "ERJ-1GEF1001C" 0201_P -308,-382 r270 bottom
Rd3 "ERJ-1GEF1001C" 0201_P -308,-341 r90 bottom
Re1 "ERJ-2BQF1R0X" 0402_P 490,-411 r0 top
Re2 "ERJ-2RKF4990X" 0402_P 486,-446 r180 top
Re3 "ERJ-2RKF1004X" 0402_P 432,-349.9 r270 top
Re4 "ERJ-2RKF2001X" 0402_P 402,-349.9 r270 top
Re5 "ERJ-2BQF1R0X" 0402_P 335,-499 r270 top
Re6 "ERJ-2RKF1002X" 0402_P 315,-443 r180 top
Re7 "DNI" 0402_P 405,140 r270 top
Re8 "ERJ-PA2J151X" 0402_P 342,142 r270 top
Rn1 "ERJ-2RKF2700X" 0402_P 475,425 r180 top
Rn2 "ERJ-2RKF1002X" 0402_P 512,493 r0 top
Rn3 "ERJ-2RKF5103X" 0402_P 560,350 r0 top
Rn4 "ERJ-2RKF1002X" 0402_P 476,284 r180 top
Rn9 "ERJ-2RKF4702X" 0402_P 356,-16 r270 top
RnB "ERJ-2GE0R00X" 0402_P 562,345 r0 bottom
RnC "ERJ-2GE0R00X" 0402_P 562,316 r0 bottom
RnF "DNI" 0402_P 62,463 r90 bottom
Rr0 "ERJ-PA2J330X" 0201 181,-591 r0 bottom
Rr1 "ERJ-PA2J330X" 0201 181,-565 r0 bottom
Rr2 "ERJ-PA2J330X" 0201 181,-614 r0 bottom
Rr3 "ERJ-PA2J330X" 0201 182,-637 r0 bottom
Rr4 "ERJ-2RKF1002X" 0201 204.62,-591 r180 top
Rr5 "ERJ-2RKF1002X" 0402_P 206,-641 r180 top
Rr6 "ERJ-2RKF1001X" 0201 204.62,-614 r180 top
Rs1 "ERJ-1GEF7153C" 0201_P -485,115 r90 bottom
Rs2 "ERJ-1GEF1803C" 0201_P -482,83 r0 bottom
RVREG1 "" J1-0603#2 224,-142 r90 top
SW1 "SWITCH_SPST" SWITCH_SPST_CHS-01TB 429,-672 r0 top
U1 "M2S060T_FC325" MCSM-CS-325 -368,-331 r270 top
U2 "Mr. Wolf PULP" QFN50P900X900X100_HS_NOVIAS_65M 51,-285 r90 bottom
U3 "NRF51822-CFAC-R" BGA_NORDIC -30.16,-727.76 r0 top
U4 "NM" NMV2 310.25,363 r180 bottom
U6 "TPS62262TDRVRQ1" TPS_PACKAGE_NOVIA -176,214.73 r0 top
U7 "TPS62261TDRVRQ1" TPS_PACKAGE_NOVIA -13.36,214.73 r0 top
U8 "TPS62263TDRVRQ1" TPS_PACKAGE_NOVIA -325,95 r0 top
U9 "TPS62260TDRVRQ1" TPS_PACKAGE_NOVIA -551.59,97.63 r0 bottom
U10 "MPU-6050" QFN-24 -506,402 r180 top
U11 "LTC4065EDC#TRMPBF" DFN-6_LT 407,-483 r0 top
Un3 "NC7WV04L6X" 6MICROPAK 292,-35 r0 top
Un5 "TXB0101" YZP6-TI 471,363 r180 top
Y1 "NX2520SA-20.000000MHZ" XOSC_4PIN -508.47,-32.76 r180 top
Y2 "NX2520SA-16.000000MHZ" XOSC_4PIN 31,-439 r180 top
YW1 "SIT1533AC-H5-DCC-32.768E" SiT1533-C 334.68,-443 r180 bottom

## Footprints (in the part's own frame and the unit in brackets; to place one, negate y for a bottom-side part, rotate by r counter-clockwise, add the part's x,y. Pads: shape width x height; smd on the part's side, far side on the other; paste and mask are expansions set on the pad)
6MICROPAK [mm]
  rect 0.5x0.3 smd paste+0 mask+0.05: 1(-0.369,0.5) 2(-0.369,0) 3(-0.369,-0.5) 4(0.381,-0.5) 5(0.381,0) 6(0.381,0.5)
  silkscreen extent -0.5,-0.77 0.5,0.86, body extent -0.5,-0.75 0.5,0.75, height 0.55
0201 [mm]
  rect 0.25x0.3 smd mask+0.05: 1(0,0) 2(0.6,0)
  silkscreen extent 0.3,-0.08 0.3,0.08
0201_P [mm] "Panasonic ERJ1G or 1R resistor"
  rect 0.25x0.3 smd mask+0.05: 1(-0.3,-0.003) 2(0.3,-0.003)
  silkscreen extent 0,-0.08 0,0.08, body extent -0.3,-0.15 0.3,0.15, height 0.23
0402#1 [mm] "Chip Capacitor, Body 1.0x0.5mm, IPC High Density"
  rect 0.6x0.5 smd: 1(-0.5,0) 2(0.5,0)
  body extent -0.55,-0.3 0.55,0.3, height 1.3
0402#2 [mm] "Chip Resistor; Body 1 x 0.5 mm (LxW typ)"
  rect 0.6x0.7 smd: 1(-0.5,0) 2(0.5,0)
  silkscreen extent 0,-0.28 0,0.28
0402_P [mm] "Panasonic ERJ2 resitor"
  rect 0.5x0.5 smd: 1(-0.5,0) 2(0.5,0)
  silkscreen extent 0,-0.18 0,0.17, body extent -0.5,-0.25 0.5,0.25, height 0.35
0402_ss [mm]
  rect 0.6x0.5 smd mask+0.09: 1(-0.498,-0.011) 2(0.502,-0.011)
  body extent -0.55,-0.31 0.55,0.29, height 0.7
0603 [mm]
  rect 0.8x0.8 smd: 1(-0.75,0) 2(0.75,0)
  silkscreen extent 0,-0.36 0,0.33, body extent -0.91,-0.36 0.94,0.36, height 0.4
ANTENNACHIP [mil]
  rect 40x100 smd: 1(-130,0) 2(130,0)
  silkscreen extent -161,-59 161,59, body extent -128,-43 128,43, height 27
BALUN_PACKAGE [mm]
  round 0.22 smd mask+0.05: A1(0.508,0.254) A2(0.008,0.254) A3(-0.492,0.254) B1(0.508,-0.146) B3(-0.492,-0.146)
  Top Layer pour cut-out: -0.689,-0.376 0.764,-0.376 0.764,0.494 -0.689,0.494
  silkscreen extent -0.77,-0.45 0.75,0.58, body extent -0.7,-0.38 0.77,0.48, height 0.69
BGA_NORDIC [mm]
  round 0.17 smd mask+0.102: A1(0.432,3.886)
  round 0.17 smd: A2(0.832,3.886) A3(1.232,3.886) A4(1.632,3.886) A5(2.032,3.886) A6(2.432,3.886) A7(2.832,3.886) A8(3.232,3.886) B1(0.432,3.486) B4(1.632,3.486) B5(2.032,3.486) B6(2.432,3.486) B7(2.832,3.486) B8(3.232,3.486) B9(3.632,3.486) C1(0.432,3.086) C5(2.032,3.086) C6(2.432,3.086) C7(2.832,3.086) C8(3.232,3.086) C9(3.632,3.086) D1(0.432,2.686) D7(2.832,2.686) D8(3.232,2.686) D9(3.632,2.686) E1(0.432,2.286) E2(0.832,2.286) E3(1.232,2.286) E7(2.832,2.286) E8(3.232,2.286) E9(3.632,2.286) F1(0.432,1.886) F2(0.832,1.886) F3(1.232,1.886) F7(2.832,1.886) F8(3.232,1.886) F9(3.632,1.886) G1(0.432,1.486) G2(0.832,1.486) G3(1.232,1.486) G4(1.632,1.486) G5(2.032,1.486) G6(2.432,1.486) G7(2.832,1.486) G8(3.232,1.486) G9(3.632,1.486) H1(0.432,1.086) H2(0.832,1.086) H3(1.232,1.086) H4(1.632,1.086) H5(2.032,1.086) H6(2.432,1.086) H7(2.832,1.086) H8(3.232,1.086) H9(3.632,1.086) J2(0.832,0.686) J3(1.232,0.686) J4(1.632,0.686) J5(2.032,0.686) J6(2.432,0.686) J7(2.832,0.686) J8(3.232,0.686)
  silkscreen extent 0,0.3 4,4.3, body extent 0.15,0.35 3.95,4.15, height 0.51
BOUR-IND-SRN4026 [mm] "Semi-shielded Power Inductors"
  rect 1.5x3.6 smd: 1(-1.5,0) 2(1.5,0)
  silkscreen extent -0.4,-2 0.4,2, body extent -1.95,-1.95 1.95,1.96, height 2.15
C0201-MURATA-GR [mm] "Murata GR series 0201 capacitor"
  rect 0.3x0.3 smd mask+0.05: 1(-0.275,0) 2(0.275,0)
  silkscreen extent 0,-0.1 0,0.1, body extent -0.3,-0.15 0.3,0.15, height 0.3
C0402-MURATA-GR [mm] "Murata GR-series 0402 capacitor"
  rect 0.42x0.55 smd: 1(-0.45,0) 2(0.45,0)
  silkscreen extent 0,-0.18 0,0.18, body extent -0.5,-0.25 0.5,0.25, height 0.5
C0402-TDK-C [mm] "TDK C-series 0402 capacitor"
  rect 0.4x0.5 smd: 1(-0.4,0) 2(0.4,0)
  silkscreen extent 0,-0.23 0,0.23, body extent -0.5,-0.25 0.5,0.25, height 0.5
C0603-MURATA-GR [mm] "Murata GR-series 0603 capacitor"
  rect 0.7x0.8 smd: 1(-0.725,0) 2(0.725,0)
  silkscreen extent 0,-0.33 0,0.33, body extent -0.8,-0.4 0.8,0.4, height 0.8
CONN_12-CLP [mm] "CLP-106-xx-x-D"
  rect 0.74x2.4 smd: 1(-3.2,-1.995) 2(-3.2,1.935) 3(-1.93,-1.995) 4(-1.93,1.935) 5(-0.66,-1.995) 6(-0.66,1.935) 7(0.61,-1.995) 8(0.61,1.935) 9(1.88,-1.995) 10(1.88,1.935) 11(3.21,-1.995) 12(3.21,1.935)
  silkscreen extent -4.11,-3.02 3.5,0, body extent -3.79,-1.53 3.8,1.5, height 2.29
CONN_16-CLP [mm] "CLP-106-xx-x-D"
  rect 0.74x2.4 smd: 1(-4.53,-1.977) 2(-4.53,1.953) 3(-3.26,-1.977) 4(-3.26,1.953) 5(-1.99,-1.977) 6(-1.99,1.953) 7(-0.72,-1.977) 8(-0.72,1.953) 9(0.55,-1.977) 10(0.55,1.953) 11(1.88,-1.977) 12(1.88,1.953) 13(3.15,-1.977) 14(3.15,1.953) 15(4.42,-1.977) 16(4.42,1.95)
  silkscreen extent -5.44,-3 5.02,0.02, body extent -5.12,-1.51 5.27,1.52, height 2.29
CONN_DF12(3.0)-80DP_BOTTOM [mm] "Hirose header 80 pos 3.0mm stack height 0.5mm pitch, pin guides, for mirroring"
  round 0.5 hole 0.52 unplated paste+0 mask+0: 0(-10.8,1.5) 0(10.8,1.5)
  rect 0.295x1.6 smd paste-0.02 mask+0.038: 1(-9.75,-1.8) 2(-9.75,1.8) 3(-9.25,-1.8) 4(-9.25,1.8) 5(-8.75,-1.8) 6(-8.75,1.8) 7(-8.25,-1.8) 8(-8.25,1.8) 9(-7.75,-1.8) 10(-7.75,1.8) 11(-7.25,-1.8) 12(-7.25,1.8) 13(-6.75,-1.8) 14(-6.75,1.8) 15(-6.25,-1.8) 16(-6.25,1.8) 17(-5.75,-1.8) 18(-5.75,1.8) 19(-5.25,-1.8) 20(-5.25,1.8) 21(-4.75,-1.8) 22(-4.75,1.8) 23(-4.25,-1.8) 24(-4.25,1.8) 25(-3.75,-1.8) 26(-3.75,1.8) 27(-3.25,-1.8) 28(-3.25,1.8) 29(-2.75,-1.8) 30(-2.75,1.8) 31(-2.25,-1.8) 32(-2.25,1.8) 33(-1.75,-1.8) 34(-1.75,1.8) 35(-1.25,-1.8) 36(-1.25,1.8) 37(-0.75,-1.8) 38(-0.75,1.8) 39(-0.25,-1.8) 40(-0.25,1.8) 41(0.25,-1.8) 42(0.25,1.8) 43(0.75,-1.8) 44(0.75,1.8) 45(1.25,-1.8) 46(1.25,1.8) 47(1.75,-1.8) 48(1.75,1.8) 49(2.25,-1.8) 50(2.25,1.8) 51(2.75,-1.8) 52(2.75,1.8) 53(3.25,-1.8) 54(3.25,1.8) 55(3.75,-1.8) 56(3.75,1.8) 57(4.25,-1.8) 58(4.25,1.8) 59(4.75,-1.8) 60(4.75,1.8) 61(5.25,-1.8) 62(5.25,1.8) 63(5.75,-1.8) 64(5.75,1.8) 65(6.25,-1.8) 66(6.25,1.8) 67(6.75,-1.8) 68(6.75,1.8) 69(7.25,-1.8) 70(7.25,1.8) 71(7.75,-1.8) 72(7.75,1.8) 73(8.25,-1.8) 74(8.25,1.8) 75(8.75,-1.8) 76(8.75,1.8) 77(9.25,-1.8) 78(9.25,1.8) 79(9.75,-1.8) 80(9.75,1.8)
  Top Layer region: -11.9,0.9 -11.1,0.9 -11.1,-0.9 -11.9,-0.9
  Top Layer region: 11.1,0.9 11.9,0.9 11.9,-0.9 11.1,-0.9
  silkscreen extent -11.1,-2 11.1,-1.3
DFN-6_LT [mm]
  rrect50% 0.25x0.675 smd paste-0.05 mask+0.05: 1(-0.5,-0.913)
  rect 0.25x0.675 smd paste-0.05 mask+0.05: 2(0,-0.913) 3(0.5,-0.913) 4(0.5,0.913) 5(0,0.913) 6(-0.5,0.913)
  rect 1.42x0.61 smd paste-0.05 mask+0.05: 7(0,0)
  silkscreen extent -0.97,-1.09 1,1, body extent -0.87,-1 1,1, height 0.75
"HEADER, 2 PIN, 2MM(79MIL)" [mm]
  round 1.5 hole 1: 1(-1,0) 2(1,0)
  silkscreen extent -2.12,-1.1 2.15,1.12
J1-0603#1 [mm] "Chip Resistor; Body 1.6 x 0.8 mm (LxW typ)"
  rect 1.1x1 smd: 1(-0.85,0) 2(0.85,0)
J1-0603#2 [mm] "Chip Resistor, Body 1.6x0.8mm, IPC High Density"
  rect 0.7x0.9 smd: 1(-0.75,0) 2(0.75,0)
  silkscreen extent -0.2,-0.35 0.2,0.35, body extent -0.85,-0.48 0.85,0.48, height 0.9
LEAD_REGULATOR [mm]
  rect 0.7x2.3 smd: 1(-3.308,-0.17) 2(-1.01,-0.17)
  silkscreen extent -2.16,-1.27 -2.16,0.89, body extent -3.4,-1.2 -0.9,0.8, height 1.1
LED-0603 [mm]
  rect 0.8x0.8 smd: 1(-0.825,0) 2(0.825,0)
  silkscreen extent 1.4,-0.35 2.15,0.3, body extent -0.8,-0.36 0.8,0.36, height 0.8
MCSM-CS-325 [mil] "BGA, 325-Balls, Body 11x11mm, Pitch 0.5mm"
  round 10 smd: A1(-196.85,196.85) A2(-177.17,196.85) A3(-157.48,196.85) A4(-137.8,196.85) A5(-118.11,196.85) A6(-98.43,196.85) A7(-78.74,196.85) A8(-59.06,196.85) A9(-39.37,196.85) A10(-19.68,196.85) A11(0,196.85) A12(19.68,196.85) A13(39.37,196.85) A14(59.06,196.85) A15(78.74,196.85) A16(98.43,196.85) A17(118.11,196.85) A18(137.8,196.85) A19(157.48,196.85) A20(177.17,196.85) A21(196.85,196.85) AA1(-196.85,-196.85) AA2(-177.17,-196.85) AA3(-157.48,-196.85) AA4(-137.8,-196.85) AA5(-118.11,-196.85) AA6(-98.43,-196.85) AA7(-78.74,-196.85) AA8(-59.06,-196.85) AA9(-39.37,-196.85) AA10(-19.68,-196.85) AA11(0,-196.85) AA12(19.68,-196.85) AA13(39.37,-196.85) AA14(59.06,-196.85) AA15(78.74,-196.85) AA16(98.43,-196.85) AA17(118.11,-196.85) AA18(137.8,-196.85) AA19(157.48,-196.85) AA20(177.17,-196.85) AA21(196.85,-196.85) B1(-196.85,177.17) B2(-177.17,177.17) B3(-157.48,177.17) B4(-137.8,177.17) B5(-118.11,177.17) B6(-98.43,177.17) B7(-78.74,177.17) B8(-59.06,177.17) B9(-39.37,177.17) B10(-19.68,177.17) B11(0,177.17) B12(19.68,177.17) B13(39.37,177.17) B14(59.06,177.17) B15(78.74,177.17) B16(98.43,177.17) B17(118.11,177.17) B18(137.8,177.17) B19(157.48,177.17) B20(177.17,177.17) B21(196.85,177.17) C1(-196.85,157.48) C2(-177.17,157.48) C6(-98.43,157.48) C11(0,157.48) C16(98.43,157.48) C20(177.17,157.48) C21(196.85,157.48) D1(-196.85,137.8) D2(-177.17,137.8) D4(-137.8,137.8) D5(-118.11,137.8) D6(-98.43,137.8) D7(-78.74,137.8) D8(-59.06,137.8) D9(-39.37,137.8) D10(-19.68,137.8) D11(0,137.8) D12(19.68,137.8) D13(39.37,137.8) D14(59.06,137.8) D15(78.74,137.8) D16(98.43,137.8) D17(118.11,137.8) D18(137.8,137.8) D20(177.17,137.8) D21(196.85,137.8) E1(-196.85,118.11) E2(-177.17,118.11) E4(-137.8,118.11) E5(-118.11,118.11) E6(-98.43,118.11) E7(-78.74,118.11) E8(-59.06,118.11) E9(-39.37,118.11) E10(-19.68,118.11) E11(0,118.11) E12(19.68,118.11) E13(39.37,118.11) E14(59.06,118.11) E15(78.74,118.11) E16(98.43,118.11) E17(118.11,118.11) E18(137.8,118.11) E20(177.17,118.11) E21(196.85,118.11) F1(-196.85,98.43) F2(-177.17,98.43) F3(-157.48,98.43) F4(-137.8,98.43) F5(-118.11,98.43) F17(118.11,98.43) F18(137.8,98.43) F19(157.48,98.43) F20(177.17,98.43) F21(196.85,98.43) G1(-196.85,78.74) G2(-177.17,78.74) G4(-137.8,78.74) G5(-118.11,78.74) G7(-78.74,78.74) G8(-59.06,78.74) G9(-39.37,78.74) G10(-19.68,78.74) G11(0,78.74) G12(19.68,78.74) G13(39.37,78.74) G14(59.06,78.74) G15(78.74,78.74) G17(118.11,78.74) G18(137.8,78.74) G20(177.17,78.74) G21(196.85,78.74) H1(-196.85,59.06) H2(-177.17,59.06) H4(-137.8,59.06) H5(-118.11,59.06) H7(-78.74,59.06) H15(78.74,59.06) H17(118.11,59.06) H18(137.8,59.06) H20(177.17,59.06) H21(196.85,59.06) J1(-196.85,39.37) J2(-177.17,39.37) J4(-137.8,39.37) J5(-118.11,39.37) J7(-78.74,39.37) J9(-39.37,39.37) J10(-19.68,39.37) J11(0,39.37) J12(19.68,39.37) J13(39.37,39.37) J15(78.74,39.37) J17(118.11,39.37) J18(137.8,39.37) J20(177.17,39.37) J21(196.85,39.37) K1(-196.85,19.68) K2(-177.17,19.68) K4(-137.8,19.68) K5(-118.11,19.68) K7(-78.74,19.68) K9(-39.37,19.68) K10(-19.68,19.68) K11(0,19.68) K12(19.68,19.68) K13(39.37,19.68) K15(78.74,19.68) K17(118.11,19.68) K18(137.8,19.68) K20(177.17,19.68) K21(196.85,19.68) L1(-196.85,0) L2(-177.17,0) L3(-157.48,0) L4(-137.8,0) L5(-118.11,0) L7(-78.74,0) L9(-39.37,0) L10(-19.68,0) L11(0,0) L12(19.68,0) L13(39.37,0) L15(78.74,0) L17(118.11,0) L18(137.8,0) L19(157.48,0) L20(177.17,0) L21(196.85,0) M1(-196.85,-19.68) M2(-177.17,-19.68) M4(-137.8,-19.68) M5(-118.11,-19.68) M7(-78.74,-19.68) M9(-39.37,-19.68) M10(-19.68,-19.68) M11(0,-19.68) M12(19.68,-19.68) M13(39.37,-19.68) M15(78.74,-19.68) M17(118.11,-19.68) M18(137.8,-19.68) M20(177.17,-19.68) M21(196.85,-19.68) N1(-196.85,-39.37) N2(-177.17,-39.37) N4(-137.8,-39.37) N5(-118.11,-39.37) N7(-78.74,-39.37) N9(-39.37,-39.37) N10(-19.68,-39.37) N11(0,-39.37) N12(19.68,-39.37) N13(39.37,-39.37) N15(78.74,-39.37) N17(118.11,-39.37) N18(137.8,-39.37) N20(177.17,-39.37) N21(196.85,-39.37) P1(-196.85,-59.06) P2(-177.17,-59.06) P4(-137.8,-59.06) P5(-118.11,-59.06) P7(-78.74,-59.06) P15(78.74,-59.06) P17(118.11,-59.06) P18(137.8,-59.06) P20(177.17,-59.06) P21(196.85,-59.06) R1(-196.85,-78.74) R2(-177.17,-78.74) R4(-137.8,-78.74) R5(-118.11,-78.74) R7(-78.74,-78.74) R8(-59.06,-78.74) R9(-39.37,-78.74) R10(-19.68,-78.74) R11(0,-78.74) R12(19.68,-78.74) R13(39.37,-78.74) R14(59.06,-78.74) R15(78.74,-78.74) R17(118.11,-78.74) R18(137.8,-78.74) R20(177.17,-78.74) R21(196.85,-78.74) T1(-196.85,-98.43) T2(-177.17,-98.43) T3(-157.48,-98.43) T4(-137.8,-98.43) T5(-118.11,-98.43) T17(118.11,-98.43) T18(137.8,-98.43) T19(157.48,-98.43) T20(177.17,-98.43) T21(196.85,-98.43) U1(-196.85,-118.11) U2(-177.17,-118.11) U4(-137.8,-118.11) U5(-118.11,-118.11) U6(-98.43,-118.11) U7(-78.74,-118.11) U8(-59.06,-118.11) U9(-39.37,-118.11) U10(-19.68,-118.11) U11(0,-118.11) U12(19.68,-118.11) U13(39.37,-118.11) U14(59.06,-118.11) U15(78.74,-118.11) U16(98.43,-118.11) U17(118.11,-118.11) U18(137.8,-118.11) U20(177.17,-118.11) U21(196.85,-118.11) V1(-196.85,-137.8) V2(-177.17,-137.8) V4(-137.8,-137.8) V5(-118.11,-137.8) V6(-98.43,-137.8) V7(-78.74,-137.8) V8(-59.06,-137.8) V9(-39.37,-137.8) V10(-19.68,-137.8) V11(0,-137.8) V12(19.68,-137.8) V13(39.37,-137.8) V14(59.06,-137.8) V15(78.74,-137.8) V16(98.43,-137.8) V17(118.11,-137.8) V18(137.8,-137.8) V20(177.17,-137.8) V21(196.85,-137.8) W1(-196.85,-157.48) W2(-177.17,-157.48) W6(-98.43,-157.48) W11(0,-157.48) W16(98.43,-157.48) W20(177.17,-157.48) W21(196.85,-157.48) Y1(-196.85,-177.17) Y2(-177.17,-177.17) Y3(-157.48,-177.17) Y4(-137.8,-177.17) Y5(-118.11,-177.17) Y6(-98.43,-177.17) Y7(-78.74,-177.17) Y8(-59.06,-177.17) Y9(-39.37,-177.17) Y10(-19.68,-177.17) Y11(0,-177.17) Y12(19.68,-177.17) Y13(39.37,-177.17) Y14(59.06,-177.17) Y15(78.74,-177.17) Y16(98.43,-177.17) Y17(118.11,-177.17) Y18(137.8,-177.17) Y19(157.48,-177.17) Y20(177.17,-177.17) Y21(196.85,-177.17)
  silkscreen extent -225,-217 217,225, body extent -217,-217 217,217, height 40
NMV2 [mil]
  rect 230x90 smd paste-250: 0(0,0)
  rect 10x4 smd paste-10: 1(-170,32) 2(-170,24) 3(-170,16) 4(-170,8) 5(-170,0) 6(-170,-8) 7(-170,-16) 8(-170,-24) 9(-170,-32) 44(170,-32) 45(170,-24) 46(170,-16) 47(170,-8) 48(170,0) 49(170,8) 50(170,16) 51(170,24) 52(170,32)
  rect 4x10 smd paste-10: 10(-132,-100) 11(-124,-100) 12(-116,-100) 13(-108,-100) 14(-100,-100) 15(-92,-100) 16(-84,-100) 17(-76,-100) 18(-68,-100) 19(-60,-100) 20(-52,-100) 21(-44,-100) 22(-36,-100) 23(-28,-100) 24(-20,-100) 25(-12,-100) 26(-4,-100) 27(4,-100) 28(12,-100) 29(20,-100) 30(28,-100) 31(36,-100) 32(44,-100) 33(52,-100) 34(60,-100) 35(68,-100) 36(76,-100) 37(84,-100) 38(92,-100) 39(100,-100) 40(108,-100) 41(116,-100) 42(124,-100) 43(132,-100) 53(132,100) 54(124,100) 55(116,100) 56(108,100) 57(100,100) 58(92,100) 59(84,100) 60(76,100) 61(68,100) 62(60,100) 63(52,100) 64(44,100) 65(36,100) 66(28,100) 67(20,100) 68(12,100) 69(4,100) 70(-4,100) 71(-12,100) 72(-20,100) 73(-28,100) 74(-36,100) 75(-44,100) 76(-52,100) 77(-60,100) 78(-68,100) 79(-76,100) 80(-84,100) 81(-92,100) 82(-100,100) 83(-108,100) 84(-116,100) 85(-124,100) 86(-132,100)
  body extent -205,-135 205,135, height 20
QFN50P900X900X100_HS_NOVIAS_65M [mm] "QFN, 64-Leads, Body 9.00x9.00mm, Pitch 0.50mm, Thermal Pad 6.30x6.30mm, IPC Low Density"
  oval 0.95x0.2 smd: 1(-4.475,3.75) 16(-4.475,-3.75) 33(4.475,-3.75) 48(4.475,3.75)
  oval 1.05x0.2 smd: 2(-4.425,3.25) 3(-4.425,2.75) 4(-4.425,2.25) 5(-4.425,1.75) 6(-4.425,1.25) 7(-4.425,0.75) 8(-4.425,0.25) 9(-4.425,-0.25) 10(-4.425,-0.75) 11(-4.425,-1.25) 12(-4.425,-1.75) 13(-4.425,-2.25) 14(-4.425,-2.75) 15(-4.425,-3.25) 34(4.425,-3.25) 35(4.425,-2.75) 36(4.425,-2.25) 37(4.425,-1.75) 38(4.425,-1.25) 39(4.425,-0.75) 40(4.425,-0.25) 41(4.425,0.25) 42(4.425,0.75) 43(4.425,1.25) 44(4.425,1.75) 45(4.425,2.25) 46(4.425,2.75) 47(4.425,3.25)
  oval 0.2x0.95 smd: 17(-3.75,-4.475) 32(3.75,-4.475) 49(3.75,4.475) 64(-3.75,4.475)
  oval 0.2x1.05 smd: 18(-3.25,-4.425) 19(-2.75,-4.425) 20(-2.25,-4.425) 21(-1.75,-4.425) 22(-1.25,-4.425) 23(-0.75,-4.425) 24(-0.25,-4.425) 25(0.25,-4.425) 26(0.75,-4.425) 27(1.25,-4.425) 28(1.75,-4.425) 29(2.25,-4.425) 30(2.75,-4.425) 31(3.25,-4.425) 50(3.25,4.425) 51(2.75,4.425) 52(2.25,4.425) 53(1.75,4.425) 54(1.25,4.425) 55(0.75,4.425) 56(0.25,4.425) 57(-0.25,4.425) 58(-0.75,4.425) 59(-1.25,4.425) 60(-1.75,4.425) 61(-2.25,4.425) 62(-2.75,4.425) 63(-3.25,4.425)
  rect 6.3x6.3 smd: 65(0,0)
  silkscreen extent -5.47,-4.7 4.7,4.7, body extent -4.6,-4.6 4.6,4.6, height 1
QFN-24 [mm] "From MPU60x0 datasheet"
  rect 2.5x2.5 smd: 0(0,0)
  rect 0.8x0.35 smd: 1(-2,1.25) 2(-2,0.75) 3(-2,0.25) 4(-2,-0.25) 5(-2,-0.75) 6(-2,-1.25) 13(2,-1.25) 14(2,-0.75) 15(2,-0.25) 16(2,0.25) 17(2,0.75) 18(2,1.25)
  rect 0.35x0.8 smd: 7(-1.25,-2) 8(-0.75,-2) 9(-0.25,-2) 10(0.25,-2) 11(0.75,-2) 12(1.25,-2) 19(1.25,2) 20(0.75,2) 21(0.25,2) 22(-0.25,2) 23(-0.75,2) 24(-1.25,2)
  silkscreen extent -2,-2 2,2, body extent -2,-2 2,2, height 0.9
SiT1533-C [mm] "Ultra-Low Power Quartz XTAL Replacement - XTAL Compatible Footprint"
  rect 0.75x1.4 smd: 1(-0.725,0) 3(0.725,0)
  rect 0.2x0.5 smd: 2(-0.1,-0.45) 4(0.1,0.45)
  silkscreen extent -1.4,-0.85 1.35,0.6, body extent -1,-0.6 1,0.6, height 0.55
SWITCH_SPST_CHS-01TB [mm] "One bit SPST DIP switch, gull wing"
  rect 1.27x1 smd: 1(-3.81,0) 2(3.81,0)
  silkscreen extent -2.7,-1.25 2.7,1.25, body extent -2.7,-1.25 2.7,1.25, height 2.5
TPS_PACKAGE_NOVIA [mm] "QFN, 6-Leads, Body 2,00x2,00mm, Pitch 0,65mm, Thermal Pad 1,60x1,00mm, IPC Medium Density"
  rect 0.3x0.4 smd: 1(-0.65,-1) 2(0,-1) 3(0.65,-1) 4(0.65,1) 5(0,1) 6(-0.65,1)
  rect 1.6x1 smd: 7(0,0)
  silkscreen extent -1.29,-1.14 -1.04,-0.89, body extent -1,-1 1,1, height 0.75
USB-MICROB_AMP_10118194-0001LF [mm]
  rect 0.4x1.35 smd: 1(-1.3,4.15) 2(-0.65,4.15) 3(0,4.15) 4(0.65,4.15) 5(1.3,4.15)
  oval 1.25x0.9 hole 0.55 slot 0.85 at 0 deg: 6(-2.5,4.15) 7(2.5,4.15)
  oval 0.9x1.55 hole 0.5 slot 1.15 at 90 deg: 8(-3.5,1.45) 9(3.5,1.45)
  Top Layer region: 0.25,0.675 1.75,0.675 1.75,2.225 0.25,2.225
  Top Layer region: -1.75,0.675 -0.25,0.675 -0.25,2.225 -1.75,2.225
  Top Layer region: 2.3,0.675 3.945,0.675 3.945,2.225 2.3,2.225
  Top Layer region: -3.945,0.675 -2.3,0.675 -2.3,2.225 -3.945,2.225
  silkscreen extent -3.75,2.63 3.72,5.48, body extent -4.05,-1.28 4,4.3, height 2.72
XOSC_4PIN [mm]
  rect 1.2x1 smd: 1(-0.85,-0.7) 2(0.85,-0.7) 3(0.85,0.7) 4(-0.85,0.7)
  silkscreen extent -1.55,-1.33 1.53,1.32, body extent -1.25,-1 1.27,1, height 0.56
YZP6-TI [mm]
  round 0.225 smd mask+0.05: A1(-0.25,0.5) A2(0.25,0.5) B1(-0.25,0) B2(0.25,0) C1(-0.25,-0.5) C2(0.25,-0.5)
  silkscreen extent -0.5,-0.75 0.5,1.23, body extent -0.45,-0.7 0.45,0.7, height 0.5

## Part data
ANT1: library part "Linx ANT-2.45-CHP-x", "ANT 2.4GHZ 802.11 BLUETOOTH SMD"
BAL1: library part BAL_NRF02D3, "BALUN 2.4GHZ"
C1 C3 C4 C5 C6 C7 C8 C9 C10 C21 C22 CW1 CW2: library part "Cap Semi", "Capacitor (Semiconductor SIM Model)"
C11 C12 C13 C14 C20 Cb31 CbA1 Ce3 Cs1 Cs3 Cs5 Cs7: library part Cap, "CAP CER 4.7UF 35V X5R 0603"
C15 C16 C17 C19 Cb1 Cb2 Cb3 Cb4 Cb5 Cb6 Cb7 Cb8 Cb9 Cb10 Cb11 Cb12 Cb60 Cd2 Cr3 Cr5: library part Cap, "CAP CER 0.1UF 16V X7S 0201"
C18 CbA0 Cd1 Cn2 Cs2 Cs4 Cs6 Cs8: library part Cap, "CAP CER 10UF 25V X5R 0603 20%"
C32 C34 C56 C58 C78 C80 Ca1 Ca4 Cb20 Cb21 Cb22 Cb23 Cb24 Cb25 Cb26 Cb27 Cb28 Cb40 Cb41 Cb42 Cb43 Cb44 Cb45 Cb46 Cb47 Cb70 Cb71 Cb72 Cb73 Cb90 Cb91 Cb92 Cb93 Cb94 Cb95 Cb96 Cb97 Cn9 Cr4: library part Cap, "CAP CER 0.1UF 50V X5R 0402"
C33 C57 C79 Cb30 Cb50 Cb80 CbB0: library part Cap, "CAP CER 22UF 10V X5R 0603"
Ca2 Cc3: library part Cap, "CAP CER 10000PF 25V X5R 0201"
Ca3 Cr8: "CAP CER 2200PF 50V X7R 0402"
Cc1 Cc2 Cr1 Cr2: "CAP CER 12PF 50V NP0 0402"
Ce1 Ce2: library part Cap, "CAP CER 1UF 16V X5R 0402"
Ce4 Cr6: library part Cap, "CAP CER 1000PF 50V X5R 0402"
Cn1: library part Cap, "CAP CER 5PF 50V NP0 0402 +-0.1pf"
Cn5 Cn6: library part Cap, "Capacitor"
CO1 J1: "12 pin female JTAG/SWD header for SmartFusion2 and Nordic"
CO3 CO4: "CONN HEADER 80POS 3MM SMD 0.5MM"
CObat COch1: "Header 1x2"
COch2: library part USB-microB, "USB micro-B connector"
Cr7: "CAP CER 0.047UF 25V X7R 0402 10%"
Cs9: library part Cap, "CAP CER 22PF 50V NP0 0402"
L1: library part BOUR-IND-SRN4026-220M, "Semi-shielded Power Inductor, 22uH, 3A"
LED0 LED3: library part LED, "LED ORANGE CLEAR 0603 SMD"
LED1: library part LED, "LED YELLOW CLEAR 0603 SMD"
LED2 LED4: library part LED, "LED RED CLEAR 0603 SMD"
Ls1 Ls2 Ls3 Ls4: library part LEAD_REGUALTOR, "FIXED IND 2.2UH 1A 120 MOHM SMD"
R1 RVREG1: library part Res3, "Resistor"
R2 Re7 RnF: library part Resistor, "Resistor"
R3 R4 R5 Rc3 Rd2 Rd3: library part Resistor, "RES SMD 1K OHM 1% 1/20W 0201"
R6 R7: "Resistor"
Rc0 Rc1 RcC RcD: library part Resistor, "RES SMD 110 OHM 1% 1/10W 0402"
Rc2: library part Resistor, "RES SMD 10K OHM 1% 1/20W 0201"
Rc4 Rc5 RnB RnC: library part Resistor, "RES SMD 0.0OHM JUMPER 1/10W 0402"
Rc6 Rc9 RcA RcB Rr0 Rr1 Rr2 Rr3: library part Resistor, "RES SMD 33 OHM 1% 1/10W 0402"
Rc7 Rc8 Rr6: library part Resistor, "RES SMD 1K OHM 1% 1/10W 0402"
Re1 Re5: library part Resistor, "RES SMD 1 OHM 1% 1/6W 0402"
Re2: library part Resistor, "RES SMD 499 OHM 1% 1/10W 0402"
Re3: library part Resistor, "RES SMD 1M OHM 1% 1/10W 0402"
Re4: library part Resistor, "RES SMD 2K OHM 1% 1/10W 0402"
Re6 Rn2 Rn4 Rr4 Rr5: library part Resistor, "RES SMD 10K OHM 1% 1/10W 0402"
Re8: library part Resistor, "RES SMD 150 OHM 5% 1/5W 0402"
Rn1: library part Resistor, "RES SMD 270 OHM 1% 1/10W 0402"
Rn3: library part Resistor, "RES SMD 499K OHM 1% 1/10W 0402"
Rn9: library part Resistor, "RES SMD 47K OHM 1% 1/10W 0402"
Rs1: library part Resistor, "RES SMD 715K OHM 1% 1/20W 0201"
Rs2: library part Resistor, "RES SMD 180K OHM 1% 1/20W 0201"
SW1: "SWITCH SLIDE DIP SPST 100MA 6V"
U1: "SmartFusion2"
U2: library part PULP_MR_WOLF, "Mr. Wolf PULP Heterogeneous Multi-Core System-On-Chip"
U3: library part nRF51822, "IC SOC 2.4GHZ MULTIPROTO 62WLCS"
U4: "Neuromodulator"
U6: library part TPS62262, "IC REG BUCK 1.2V 0.6A SYNC 6SON"
U7: library part TPS62261, "IC REG BUCK 1.8V 0.6A SYNC 6SON"
U8: library part TPS62263, "IC REG BUCK 2.5V 0.6A SYNC 6SON"
U9: library part TPS62260DRVR, "IC REG BUCK ADJ 0.6A SYNC 6SON"
U10: "GYRO/ACCELEROMETER 6AXIS 24QFN"
U11: library part LTC4065EDC, "IC CHARGER BATT LI-ON 6-DFN"
Un3: library part "Dual Inverter", "IC INVERTER ULP-A DUAL 6MICROPAK"
Un5: "Single level converter"
Y1: library part XOSC, "CRYSTAL 20.0000MHZ 10PF SMD"
Y2: library part XOSC, "CRYSTAL 16.0000MHZ 10PF SMD"
YW1: library part SIT-OSC32KHZ-SIT1533AC-H5-DCC-32.768, "20 ppm, Ultra-Low Power 32.768 kHz Quartz XTAL Replacement"

## Via types
v1: diameter 10, hole 4, Top Layer to Bottom Layer, tented both sides, 361 vias
v2: diameter 14, hole 6, Top Layer to Bottom Layer, tented both sides, 104 vias
v3: diameter 16, hole 8, Top Layer to Bottom Layer, tented both sides, 3 vias
v4: diameter 20, hole 8, Top Layer to Bottom Layer, tented both sides, 2 vias
v5: diameter 20, hole 10, Top Layer to Bottom Layer, tented both sides, 2 vias

## Nets (pads, with @x,y where several pads share a name; then routed paths per layer and width w, separated by ;. In a path a pad name is that pad's centre, name@x,y a point inside that pad or via, vN(x,y) a via of type N, cw(c..) or ccw(c..) an arc to the next point about the centre after c; other vN are vias at no path point)
ACC_CLKIN: U1.T5 U10.1 | length 595.2
  Top Layer w4: v1(-439,262) -439,350 -436.47,352.53 U10.1@-427,352.53
  Signal 2 w3: -476,-115 -476,-202.85 -466.43,-212.43 v1(-466.43,-212.89)
  Signal 2 w4: -476,-115 -439,-78 v1(-439,262)
ACC_INT: U1.U5 U10.12 | length 848
  Top Layer w4: v1@-581,480.74 U10.12@-555.21,480.74
  Signal 2 w4: v1(-581,481) -602.5,459.5 -602.5,-197.5 -574,-226 -499.22,-226 v1(-486.11,-212.89) v1@-484.89,-212.89
ACC_SCL: R7.1 U1.R5 U10.23 | length 716.4
  Top Layer w4: U10.23@-476.47,323.26 -476.47,304.47 v1(-468,296)
  Signal 2 w3: v1(-446.74,-212.89) -446.74,-210.74 -437.24,-201.24 -437.24,-115.24
  Signal 2 w4: v1(-468,296) -428,296 -414,282 -414,-92 -437.24,-115.24
  Bottom Layer w3: R7.1@-470.45,412.39 -468,409.94 v1(-468,296)
ACC_SDA: R6.1 U1.R4 U10.24 | length 696.4
  Top Layer w4: U10.24@-457.39,322.65 -457,322.26 v1(-457,285)
  Signal 2 w3: -456.24,-114.24 -456.24,-183.7 v1(-446.74,-193.2)
  Signal 2 w4: v1(-457,285) -434,285 -425,276 -425,-83 -456.24,-114.24
  Bottom Layer w4: v1(-457,285) -434.45,307.55 R6.1@-434.45,412.39
ANT1: BAL1.A3 U3.D1 | length 44.5
  Top Layer w4: BAL1.A3@-57.63,-622 U3.D1@-13.16,-622
ANT2: BAL1.B3 U3.C1 | length 44.5
  Top Layer w4: BAL1.B3@-57.63,-606.25 U3.C1@-13.16,-606.25
C2N1_D: RnC.2 U1.K5 | length 1546.7
  Top Layer w3: v1(-350,-174) -358,-182 -358,-203.2 U1.K5@-348.32,-212.89
  Signal 2 w3: v1(-350,-174) -350,-102
  Signal 2 w4: -350,-102 -371,-81 -371,3.39 -358,16.39 -358,237 -203,392 525,392 v1(602,315)
  Bottom Layer w4: RnC.2@582.68,315 v1(602,315)
C2N1_D_I: Cn6.2 RnC.1 U4.8 | length 97.6
  Bottom Layer w4: U4.8@480.25,339 493,339 516,316 RnC.1@542.32,316 ; Cn6.2@544.28,288 RnC.1@544.28,314.03
C2N1_V: RnB.2 U1.K4 | length 1305.3
  Signal 1 w4: v1(-348.32,-193.2) -238,-82.89 -238,-11 -204,23 382,23 616,257 616,328 v1(602,342)
  Bottom Layer w4: RnB.2@581.68,345 584.69,342 v1(602,342)
C2N1_V_I: Cn5.2 RnB.1 U4.7 | length 95.9
  Bottom Layer w4: U4.7@480.25,347 505,347 512,340 537.32,340 RnB.1@542.32,345 544.28,346.96 Cn5.2@544.28,373
CHG_IN: Ce1.2 COch1.1 COch2.1 Re2.2 U11.4 | length 717.5
  Top Layer w8: Re2.2@467.21,-445.9 426.37,-445.9 426.37,-417.63 476.25,-367.75 476.25,-347.75 550,-274 550,59.63 COch1.1@590,99.63 ; COch2.1@486.61,-206.18 550,-206.18
CHRGN: LED4.2 U11.2 | length 165.2
  Top Layer w6: U11.2@406.68,-517.75 U11.2@406.68,-516.75
  Top Layer w8: U11.2@406.68,-517.75 406.68,-575.82 416.68,-585.82 499.66,-585.82 LED4.2@506,-579.48
CM_CHARGE_ENA: Re3.2 U11.5 | length 89.1
  Top Layer w6: U11.5@406,-447.07 406,-412 427,-391 427,-376.59 Re3.2@434,-369.59
CM_CHARGE_I: Ce4.2 Re6.2 U3.F8 | length 442.7
  Top Layer w4: v1(259,-630) 288,-601 288,-450.32 Re6.2@295.32,-443 Ce4.2@295.28,-413
  Signal 1 w4: v1@97.09,-653.28 v1(97.09,-653.5) 134.5,-653.5 165,-684 228,-684 259,-653 v1(259,-630)
DRDY_NRF: U2.18 U3.J7 | length 445.6
  Top Layer w4: v1(-154,-419) -123,-450 -123,-503.5 v1(-107.5,-519)
  Signal 1 w3: v1(-107.5,-519) -74,-552.5 -17.5,-552.5 3,-573 3,-622.41 v1(81.34,-700.75)
  Bottom Layer w4: v1(-154,-419) -147.95,-412.95 U2.18@-123.21,-412.95
DRDY_OUT: U2.17 U3.J6 | length 429.2
  Top Layer w3: v1(-155,-440) -131,-464
  Top Layer w4: v1(-131,-519) -131,-464
  Signal 2 w3: v1(-131,-519) -104,-546 -28.48,-546 0,-574.48 0,-624 65.59,-689.59 v1(65.59,-700.75)
  Bottom Layer w4: v1(-155,-440) -147.64,-432.64 U2.17@-125.18,-432.64
EXTAL: Cc1.2 U1.Y4 Y1.1 | length 267.5
  Top Layer w3: v1(-545.17,-193.2) -535,-183.04 -535,-122
  Top Layer w4: -535,-122 -509,-96 -509,-37 -477.2,-5.2 Y1.1@-475,-5.2 Y1.1@-464.89,-15.31
  Top Layer w6: Y1.1@-464.89,-15.31 Cc1.2@-430,-15.31
GND: BAL1.B1 C1.1 C3.1 C4.1 C5.1 C6.1 C7.1 C8.1 C9.1 C10.1 C11.1 C12.1 C13.1 C14.1 C15.1 C16.1 C17.1 C18.1 C19.1 C20.1 C21.1 C22.1 C34.1 C58.1 C80.1 Ca1.1 Ca2.1 Ca3.1 Ca4.1 Cb1.1 Cb2.1 Cb3.1 Cb4.1 Cb5.1 Cb6.1 Cb7.1 Cb8.1 Cb9.1 Cb10.1 Cb11.1 Cb12.1 Cb20.1 Cb21.1 Cb22.1 Cb23.1 Cb24.1 Cb25.1 Cb26.1 Cb27.1 Cb28.1 Cb30.1 Cb31.1 Cb40.1 Cb41.1 Cb42.1 Cb43.1 Cb44.1 Cb45.1 Cb46.1 Cb47.1 Cb50.1 Cb60.1 Cb70.1 Cb71.1 Cb72.1 Cb73.1 Cb80.1 Cb90.1 Cb91.1 Cb92.1 Cb93.1 Cb94.1 Cb95.1 Cb96.1 Cb97.1 CbA0.1 CbA1.1 CbB0.1 Cc1.1 Cc2.1 Cc3.1 Cd1.1 Cd2.1 Ce2.1 Ce4.1 Cn1.1 Cn2.1 Cn5.1 Cn6.1 Cn9.1 CO1.6 CO1.8 CObat.2 COch1.2 COch2.5 Cr1.2 Cr2.2 Cr3.1 Cr4.1 Cr5.1 Cr6.2 Cr7.1 Cr8.1 Cs1.1 Cs2.1 Cs3.1 Cs4.1 Cs5.1 Cs6.1 Cs7.1 Cs8.1 CW1.1 CW2.1 J1.5 LED0.2 LED1.2 LED2.2 LED3.2 Rc7.1 Rc8.1 Rd3.2 Re1.1 Re3.1 Re4.1 Re5.1 Re7.1 Rn3.2 Rn4.1 RnF.1 Rr6.1 Rs2.1 U1.A1 U1.A6 U1.A11 U1.A16 U1.A21 U1.AA1 U1.AA12 U1.AA14 U1.AA16 U1.AA18 U1.AA20 U1.D7 U1.D12 U1.D17 U1.F4 U1.F21 U1.G14 U1.H1 U1.H18 U1.J7 U1.J9 U1.J10 U1.J11 U1.K12 U1.K13 U1.L4 U1.L12 U1.L13 U1.M10 U1.M11 U1.M17 U1.M21 U1.N10 U1.N11 U1.P7 U1.P15 U1.R1 U1.T4 U1.T21 U1.U6 U1.U7 U1.U13 U1.U16 U1.Y6 U1.Y12 U1.Y14 U1.Y16 U1.Y18 U1.Y20 U2.49 U2.65 U3.B1 U3.B4 U3.C8 U3.D7 U3.G6 U3.G9 U3.H3 U4.3 U4.5 U4.50 U6.2 U6.6 U6.7 U7.2 U7.6 U7.7 U8.2 U8.6 U8.7 U9.2 U9.6 U9.7 U10.0 U10.9 U10.11 U10.18 U11.1 U11.7 Un3.2 Un5.B1 Y1.2 Y1.4 Y2.2 Y2.4 YW1.2 | length 3682.5
  Top Layer w4: Y1.2@-552.28,-17.28 -541.93,-6.93 Y1.2@-541.93,-5.2 ; v1(-552.11,520.53) -538.39,520.53 -535.53,517.66 U10.11@-535.53,480.74 ; v2(255,-35) Un3.2@277.47,-35 ; Un5.B1@480.84,363 492,363 v1(500,371) ; Cn1.1@529.72,463 v1(557,463) ; Cb40.1@576.72,308 600,284.72 v1(600,277) ; Rn3.2@579.68,350 579.68,393.86 592.54,381 v1(604,381)
  Top Layer w6: Cc2.1@-590,-17.28 Y1.2@-552.28,-17.28 ; U10.18@-581,356.53 -551.47,356.53 v1(-506,402) ; U10.11@-535.53,480.74 -535.53,431.53 v1(-506,402) ; v1(-496.16,480.74) -496.16,411.84 v1(-506,402) ; Y1.4@-469.37,-54.68 Cc1.1@-430,-54.68 ; v2(-369,274) -362.32,274 Rc8.1@-341,295.32 ; v1(-309,-492) -308.94,-491.94 U1.H18@-308.94,-468.8 ; v2(-209,-22) -209,-10.28 Cb25.1@-183.72,15 ; Cb28.1@-203,-86.72 -202.72,-87 v2(-174,-87) ; Cb24.1@-174,-86.72 Cb26.1@-145,-86.72 Cb27.1@-114,-86.72 ; v1(62,443.32) 106.65,487.96 J1.5@106.65,523.15 ; v1(66,-622) U3.D7@81.34,-622.01 ; Cb42.1@75.72,7 v2(75.72,-25) 75.72,-48.03 C6.1@83.68,-56 ; v2(163.43,-36) Cb31.1@163.43,4 ; v2(285,306) 362.28,306 Cb94.1@377.28,321 ; Ce2.1@468.24,-481.82 Ce2.1@472,-478.06
  Top Layer w8: U1.Y6@-545.17,-232.57 -526,-251.74 v1@-526,-253 ; U8.2@-325.24,56.63 U8.7@-325.24,96 ; U6.2@-176,175.36 U6.7@-176,214.73 ; v1(-97.72,-565) Cr6.2@-95,-562.28 ; C8.1@-66,-406.32 -32,-372.32 v2(-32,-358) ; C10.1@-50.32,-143 -48.32,-145 C9.1@-48.32,-197 -48.32,-223.68 v2(-48,-224) ; C4.1@-47.32,-298 C7.1@-47.32,-256 -41.32,-262 v2(-18,-262) ; v1(-17.68,-24) C21.1@-17,-23.32 ; U7.2@-13.36,175.73 U7.7@-13.36,218.73 ; v2(-4,-374) -2.46,-375.54 Y2.2@-2.46,-411.44 ; v2(48,-186) 80.54,-186 C1.1@94.54,-172 ; Y2.4@64.46,-466.56 66.56,-466.56 82,-482 118,-482 v2(146,-510) ; v1(84.72,-517) 91.72,-510 Cr5.1@114,-510 ; v2(151,-290) 185.31,-290 CW1.1@194.32,-281 ; v2(153,-268) 153,-248.85 CW2.1@165.39,-236.45 ; v2(158,-381) 241.69,-381 C3.1@242,-381.32 ; Rr6.1@204.62,-614 216,-614 v1(227,-603) ; v1(325,-366) 330.72,-371.72 Ce4.1@330.72,-413 ; U11.1@387,-517.75 U11.7@387,-483 ; Re4.1@402,-330.21 Re3.1@432,-330.21 ; Re3.1@430.32,-330.22 431.1,-331 v3(457,-331)
  Top Layer w10: CO1.8@-152.82,560.98 CO1.6@-152.82,610.98 v2(-82,611)
  Top Layer w12: LED0.2@284.48,343 285,342.48 v2(285,306) ; LED0.2@285.48,344 LED2.2@285.48,382 v2(285.48,420) LED3.2@285.48,423 ; Cb46.1@350.72,-93 356.72,-99 v2(394.28,-99) ; Re7.1@405,159.68 423.69,178.37 COch1.2@590,178.37
  Top Layer w15: Re5.1@336.68,-483 387,-483 U11.7@407,-483 ; U11.7@406.68,-481.82 Ce2.1@468.24,-481.82
  Bottom Layer w3: Cs8.1@-547.54,285 Cs8.1@-541,291.54
  Bottom Layer w4: U4.50@140.25,379 153,379 159,373 v1(159,366) ; v2(255,-35) 274.28,-35 Cb20.1@275.28,-36 ; U4.5@480.25,363 492,363 v1(500,371) 492,379 U4.3@480.25,379 ; Cn6.1@579.72,288 590.72,277 v1(600,277) ; Cn5.1@579.72,373 579.72,376.72 584,381 v1(604,381)
  Bottom Layer w6: v1(-616,-169) Cb60.1@-590.17,-169 ; Cb80.1@-581,-273.57 C14.1@-531,-273.57 ; v1@-544.85,-351 C15.1@-526.83,-351 ; C16.1@-526.83,-370 C15.1@-526.83,-351 ; C17.1@-526.83,-332 C15.1@-526.83,-351 ; C80.1@-513.68,-429.43 v1(-486.11,-429.43) ; v1(-486.11,-370.37) -485.74,-370 Cb6.1@-468.83,-370 Cb5.1@-468.83,-351 ; v1@-427,-409.69 Cb12.1@-427,-372.83 ; -426.83,-392.83 Cb7.1@-408,-392.83 Cb8.1@-388,-392.83 ; Cb11.1@-425.86,-311.32 v1(-407.37,-311.32) ; v2(-400,-53.43) -376.57,-53.43 -370,-60 C34.1@-370,-73.28 ; v1(-387.68,-449.11) -359.54,-449.11 Cd1.1@-357,-446.57 ; v2(-369,274) -325,274 -307,292 Rc7.1@-307,295.32 ; v1(-328.63,-331) Rd3.2@-311.93,-331 ; v1(-328.63,-291.63) C19.1@-328.63,-274.46 ; Cc3.1@-328.43,-291.83 Cd2.1@-307,-291.83 ; Cb21.1@-203,-86.72 Cb22.1@-174,-86.72 Cb23.1@-145,-86.72
  Bottom Layer w8: U9.7@-551.59,97.63 U9.2@-551.59,137 ; C14.1@-531,-275 C18.1@-489.57,-275 ; C18.1@-486.11,-279.54 v1(-486.11,-252.26) ; v2(226,-76) 227.18,-77.18 U2.49@227.18,-137.36 U2.49@243.64,-137.36 ; v2(300,-490) 328,-490 338.62,-479.38 YW1.2@338.62,-460.72
  Bottom Layer w12: Cb50.1@364.54,-94 369.54,-99 v2(394.28,-99)
  Bottom Layer w15: C11.1@-198,-236.54 -194.03,-232.57 v1(-171.15,-232.57)
  other v1: 186.97,-702 18.35,-685 65.59,-669.25 112.83,-669.25 -97,-606.25 97.09,-606.26 -13.15,-590.51 34.09,-590.51 181.72,-537 -466.43,-527.85 -387.68,-527.85 -269.57,-527.85 -171.15,-527.85 -590,-522.72 -564.85,-508.17 -545.17,-508.17 217,-475 -564.85,-468.8 -545.17,-468.8 -230.2,-449.11 -564.85,-429.43 -545.17,-429.43 -171.15,-429.43 -590,-427.28 -427.06,-409.74 -590,-402.72 -564.85,-390.06 -545.17,-390.06 -289.26,-390.06 -368,-370.37 -348.32,-370.37 -564.85,-350.68 -545.17,-350.68 -368,-350.68 -348.32,-350.68 -230.2,-350.68 -407.37,-331 -387.68,-331 -171.15,-331 -387.68,-311.32 -328.63,-311.32 -590,-307.28 -526,-252 -427.06,-252.26 -328.63,-252.26 -230.2,-252.26 -486.11,-232.57 -388,-232.58 -466.43,-193.2 -368,-193.2 -269.57,-193.2 -564.85,-134.15 -446.74,-134.15 -308.94,-134.15 -171.15,-134.15 -493.81,83.12 -528,250.28 495.68,284 -506.39,386.53 -506.39,417.53 -477,530.83
  other v2: -87.72,-685 -87.72,-655 -30.72,-517 470.32,-411 94,-331 75,-307 51,-280 472,-104 493,-104 394.28,-68 -488,-50 394.28,-37 -528,-16 -298,92 -571,98 -533,98 -270,99 -6,215.73 13,215.73 -182,216.73 -149,216.73 492.72,234 -555,285 -457.28,570 597,587 -572.72,605 -457.28,605 597,622 -572.72,640 -457.28,640 597,657 -598.54,690 -431.46,690 607.83,697
  other v3: 391,-482 420,-482
GPIO0: J1.14 Rc0.2 U1.Y1 | length 2115.1
  Top Layer w4: v1(-59,455) -59,557 -22,594 258,594 309,645 J1.14@309.02,677.87
  Top Layer w6: v1(-59,455) -59,418 -11,370 136.31,370 Rc0.2@161.19,345.12
  Signal 1 w4: v1(-593,552) -569.44,552 -508.44,491 -428,491 -404,467 -71,467 v1(-59,455)
  Signal 3 w4: v1(-593,552) -603,542 -603,-76.31 v1(-545.17,-134.15)
GPIO1: J1.10 Rc1.2 U1.AA2 | length 2092.4
  Top Layer w4: v1(-564.85,-153.83) U1.AA2@-564.85,-152.85 ; v1(-86,481) -86,572 -47,611 172,611 206.65,645.65 J1.10@206.65,677.87
  Top Layer w6: v1(-86,481) -86,424 -19,357 111.31,357 Rc1.2@161.19,307.12
  Signal 1 w4: v1(-586,571) -547,571 -518,542 -423,542 -363,482 v1@-86,482
  Signal 3 w4: v1(-586,571) -588.14,571 -611,548.14 -611,-107.68 v1(-564.85,-153.83)